# Altium PCB SensorCentral.PcbDoc (part 1 of 3)
Units mm, origin at the board's own origin, x right, y up, seen from the top; angles counter-clockwise.
Board outline 99.21 x 99.07 mm, 6 copper layers (Top Layer 1, GND1, Signal, GND2, GND3, Bottom Layer 1), stack 1.538 mm thick; 91 components, 67 nets, 452 pads, 462 vias.
Unrouted connection lines stored in the file: 278.
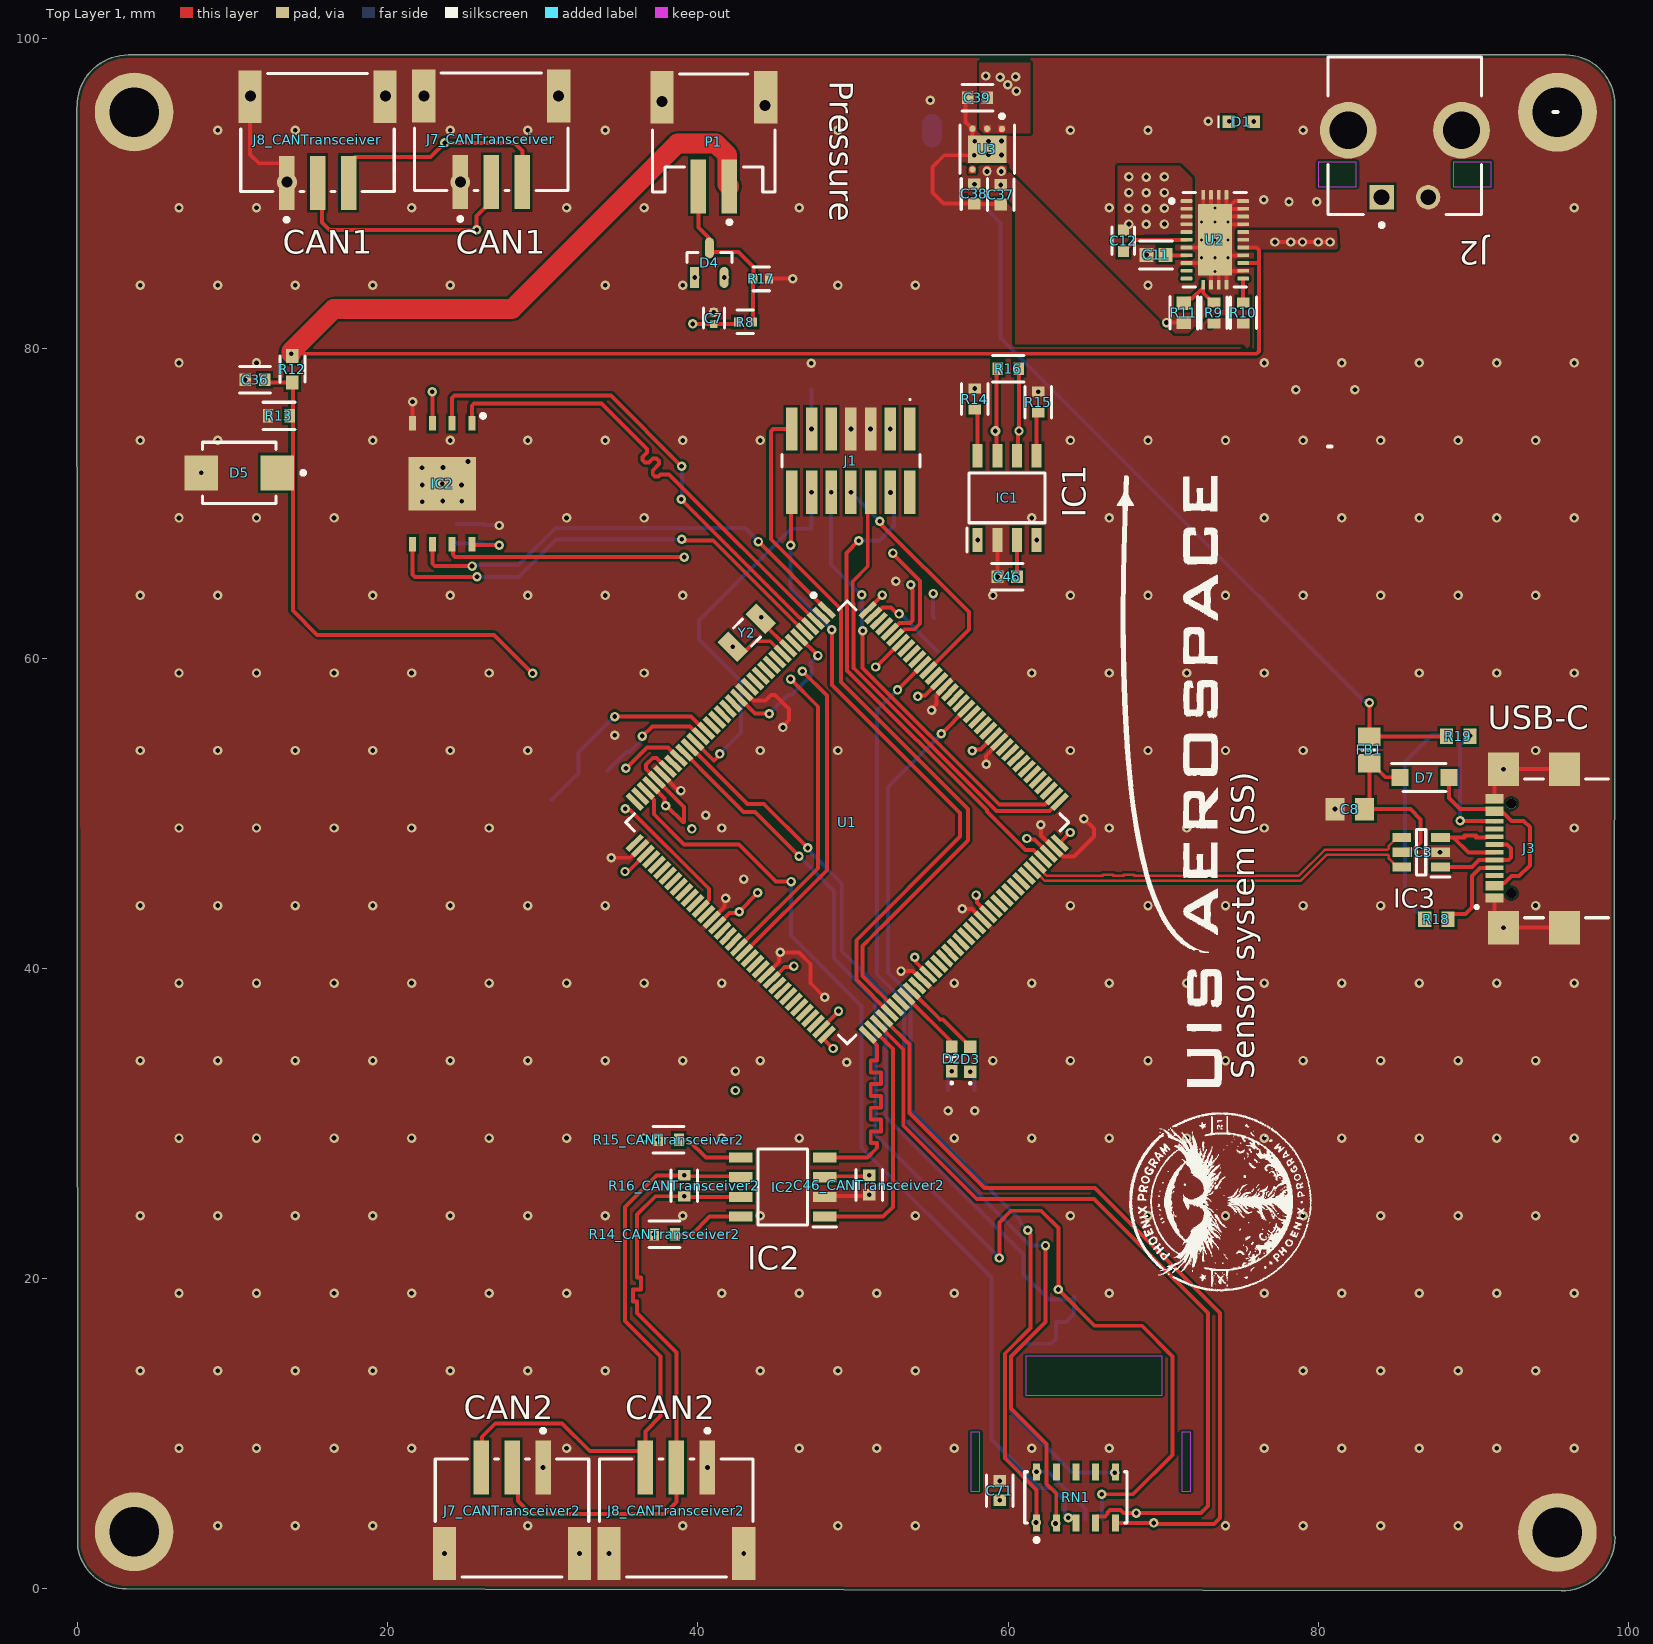
[diagram p0: Top Layer 1 view]
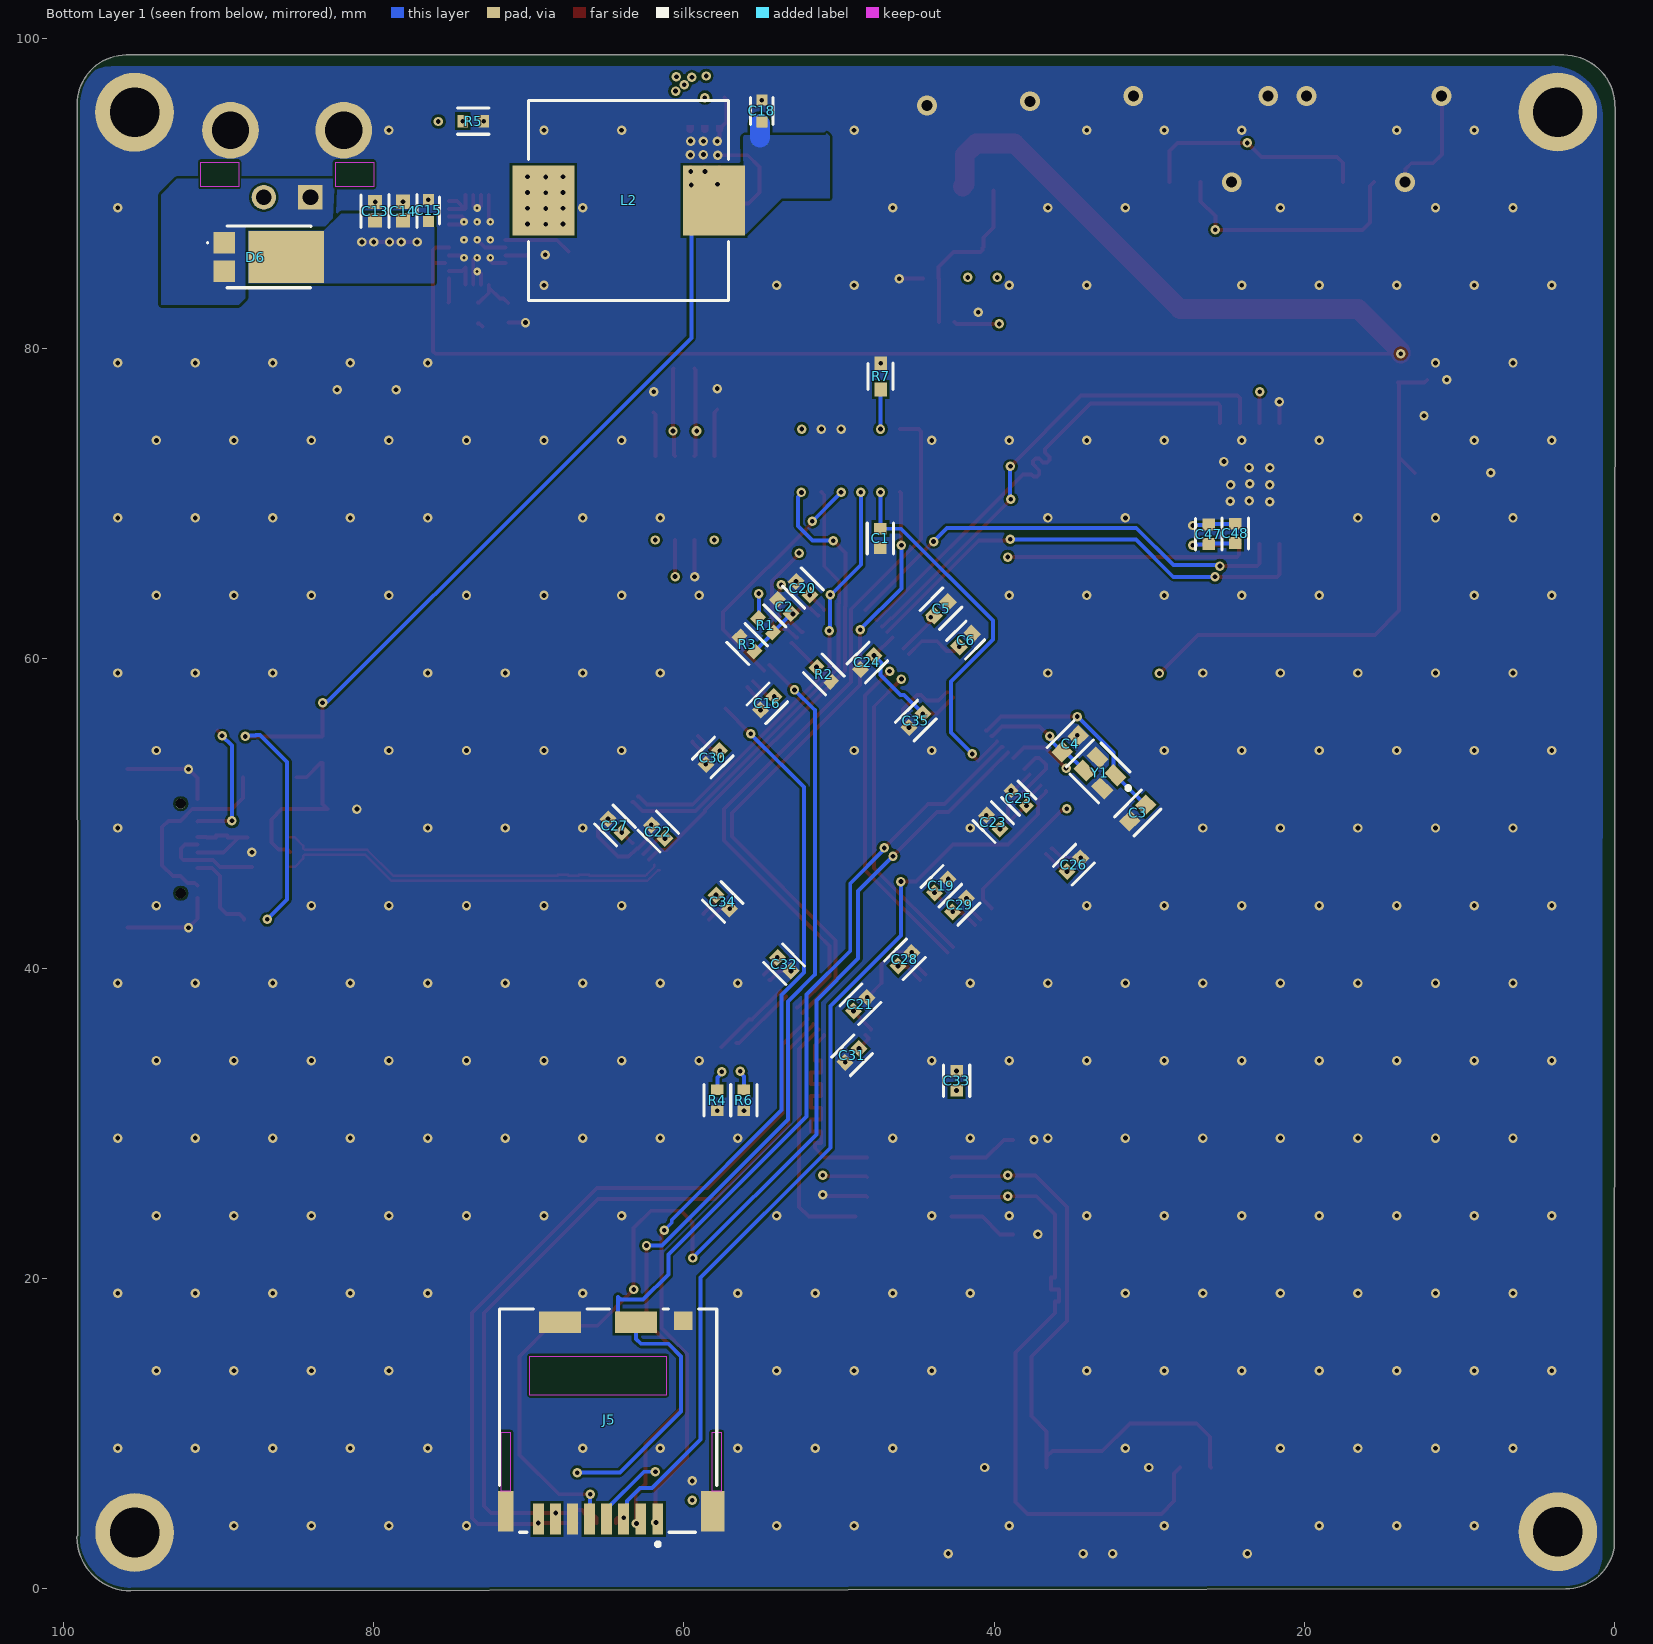
[diagram p1: Bottom Layer 1 view, seen from below]
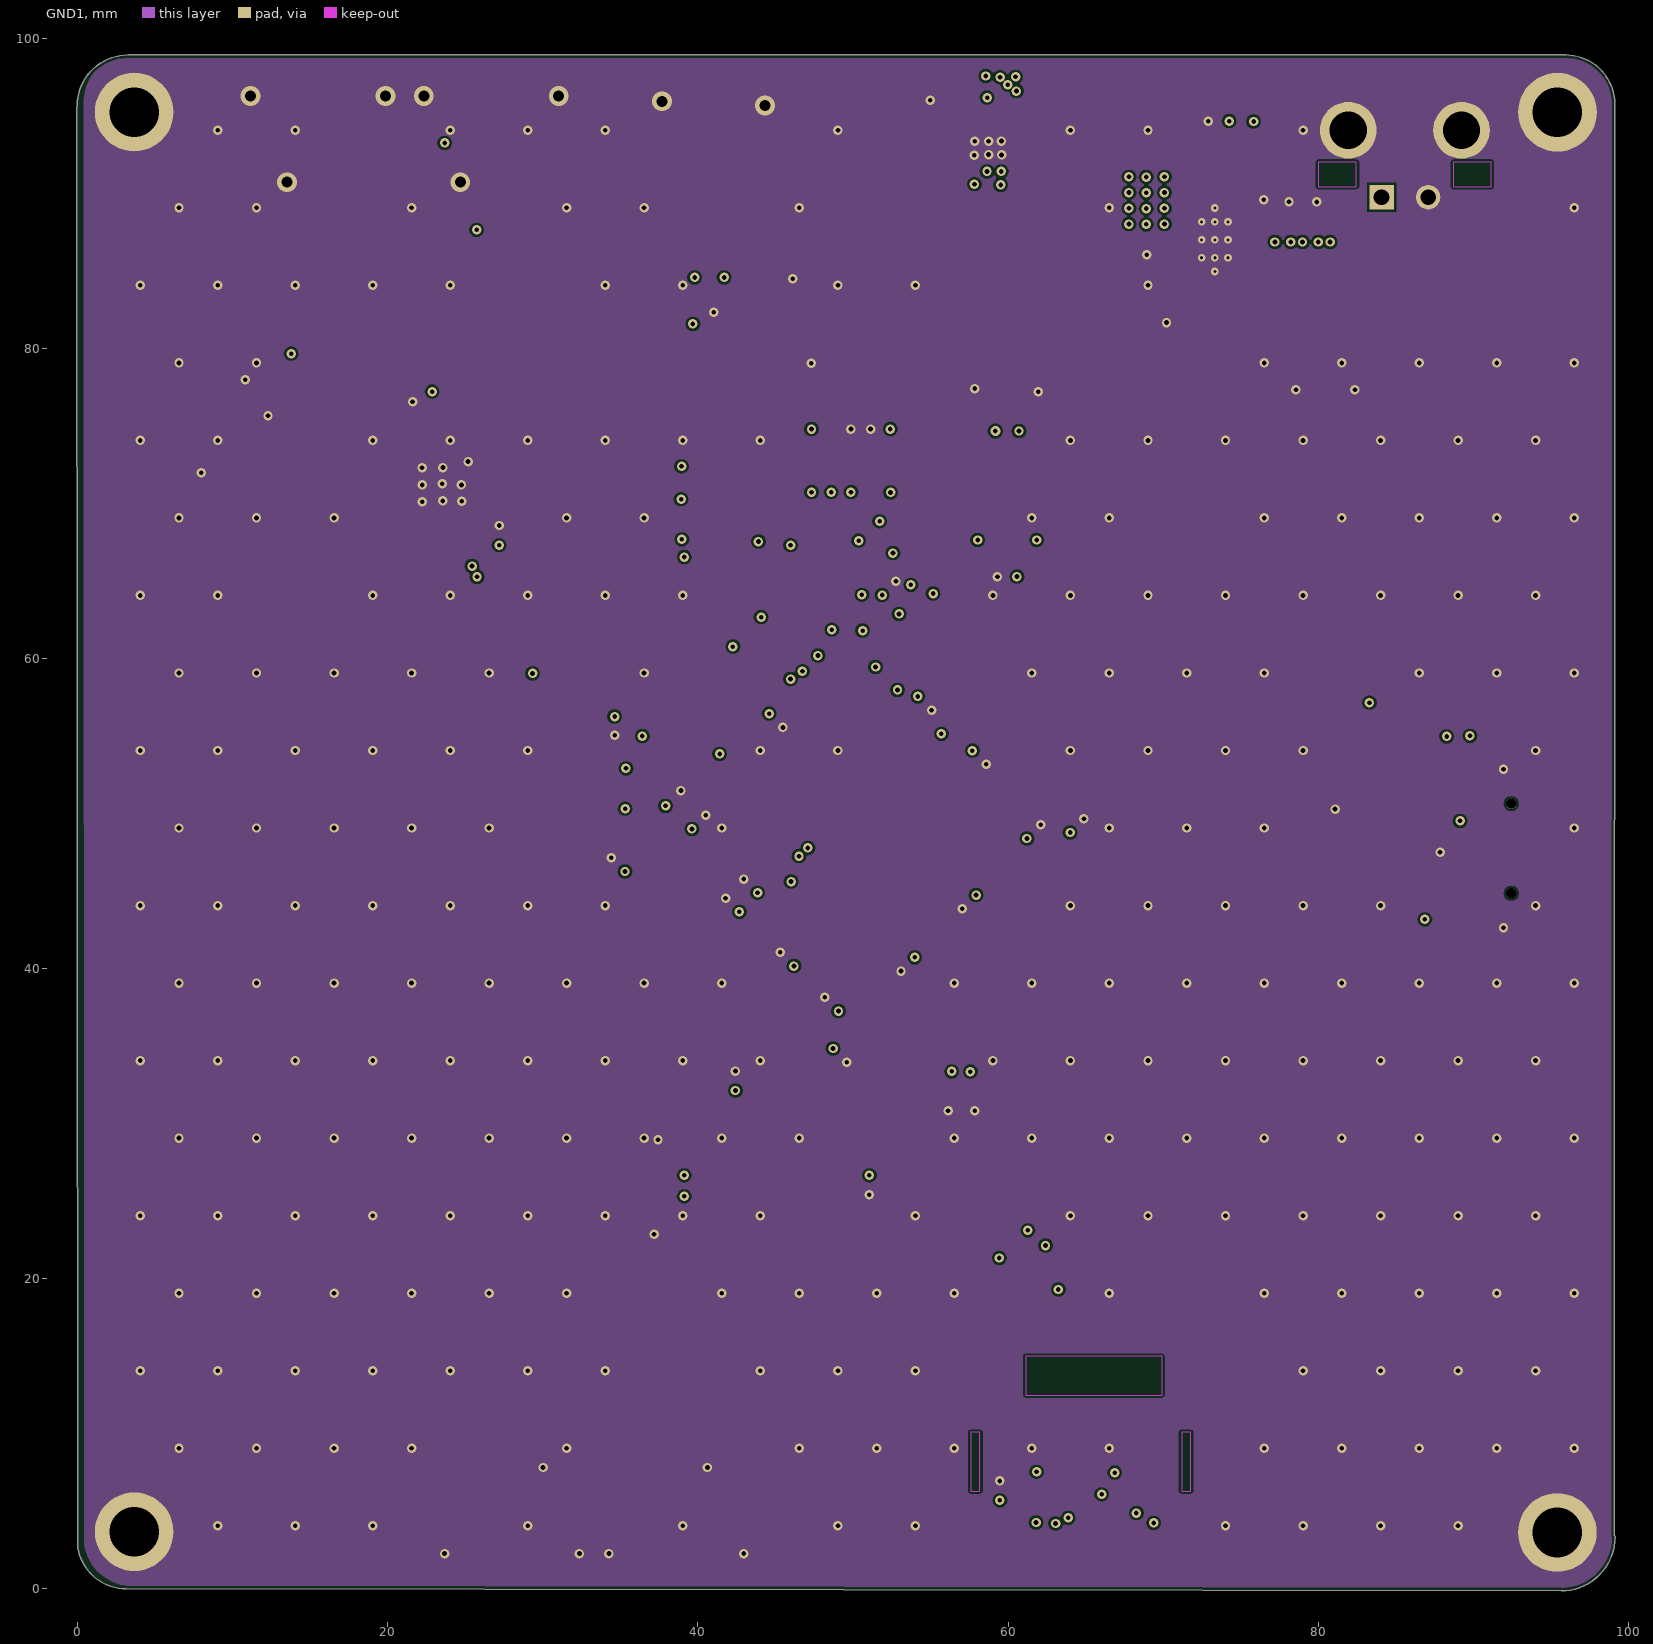
[diagram p2: GND1]
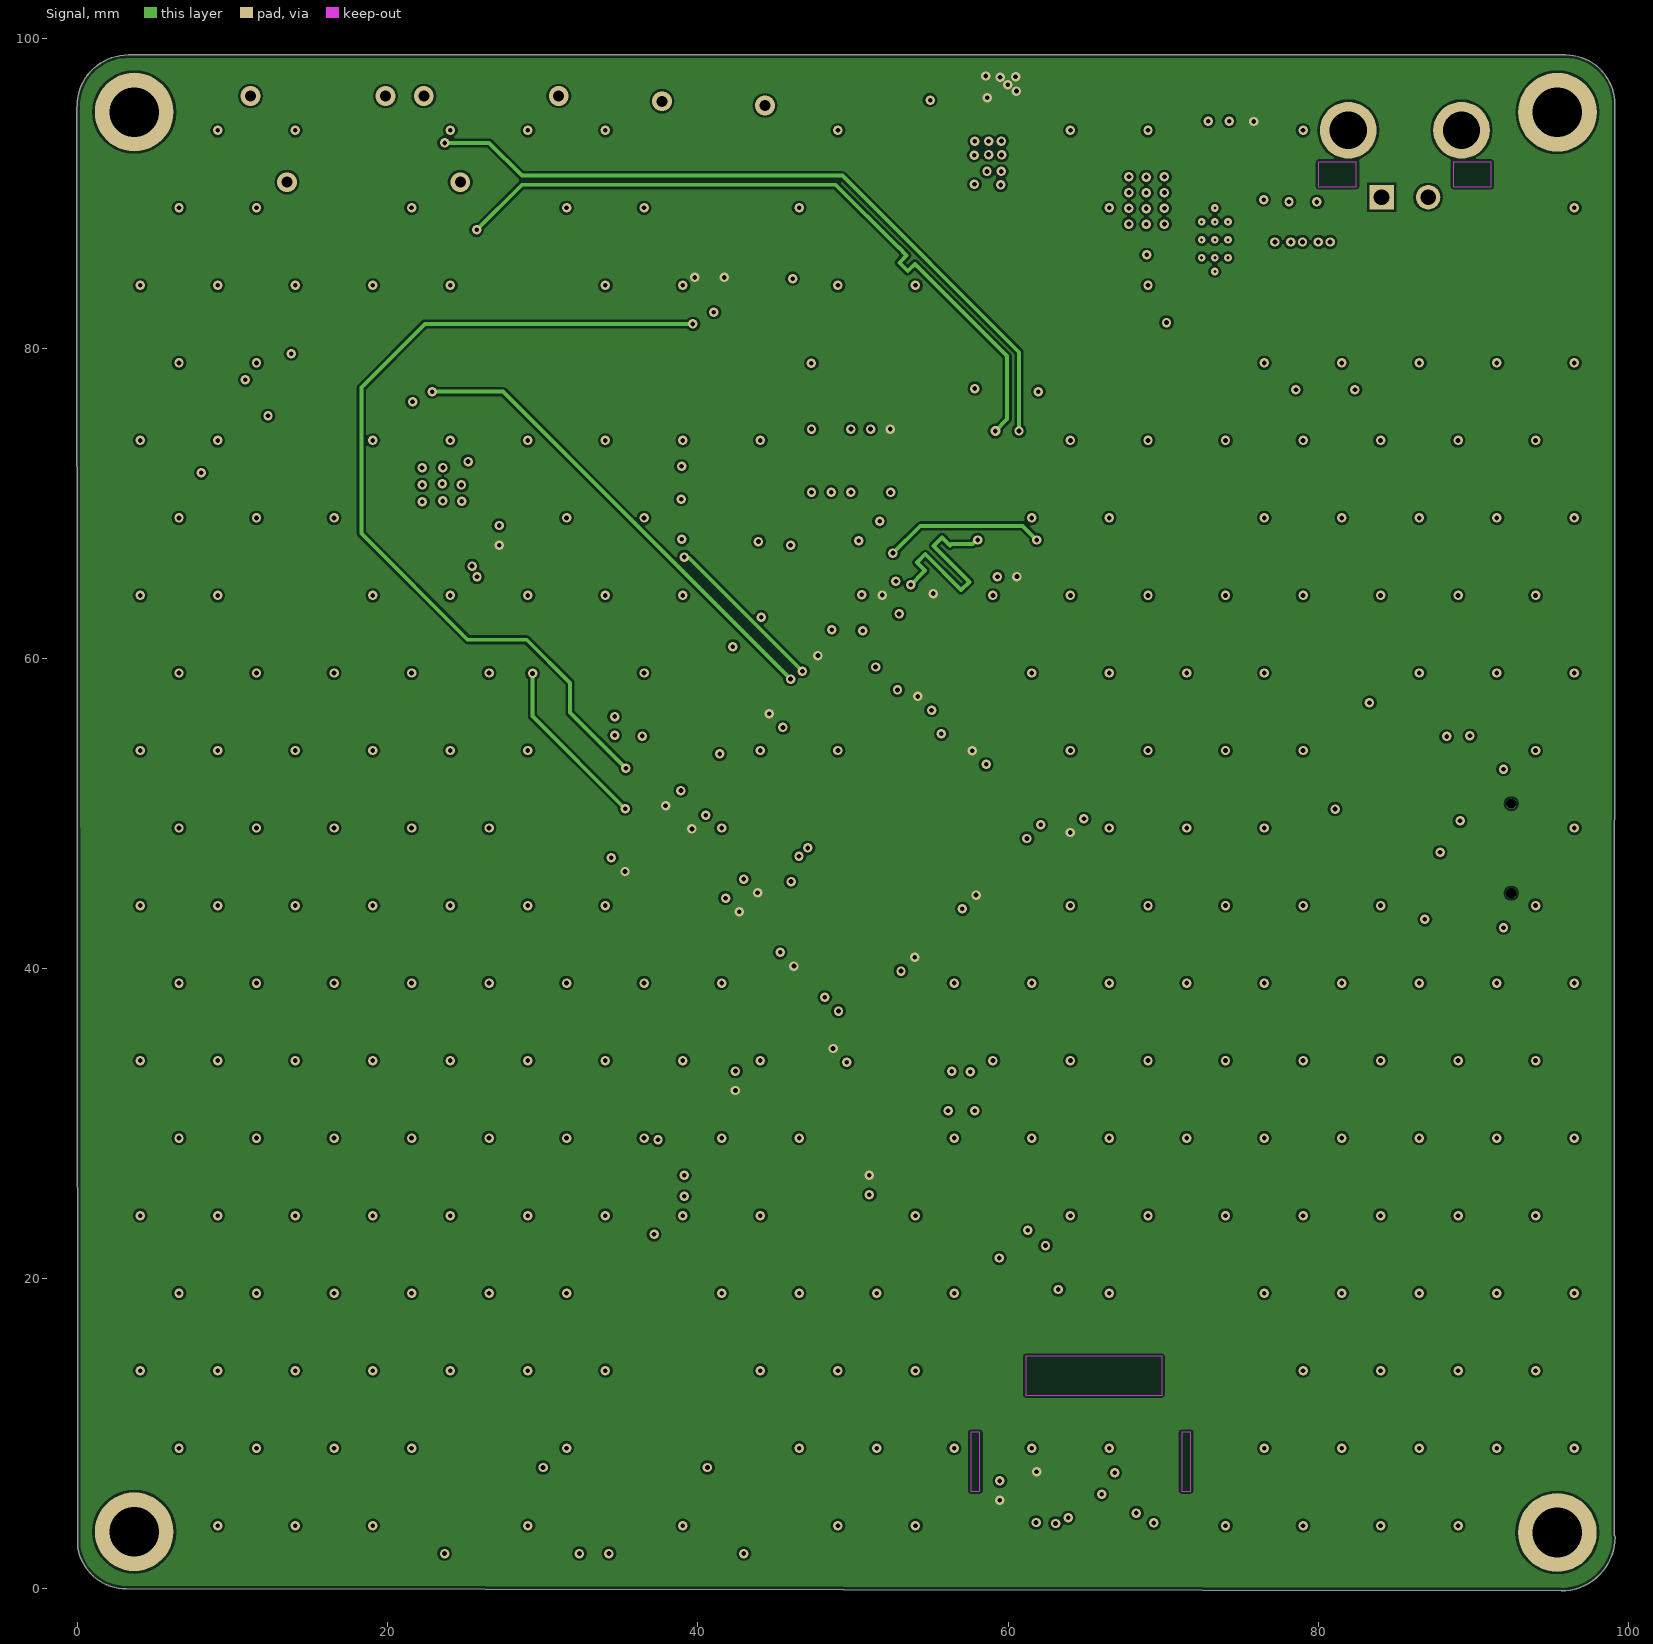
[diagram p3: Signal]
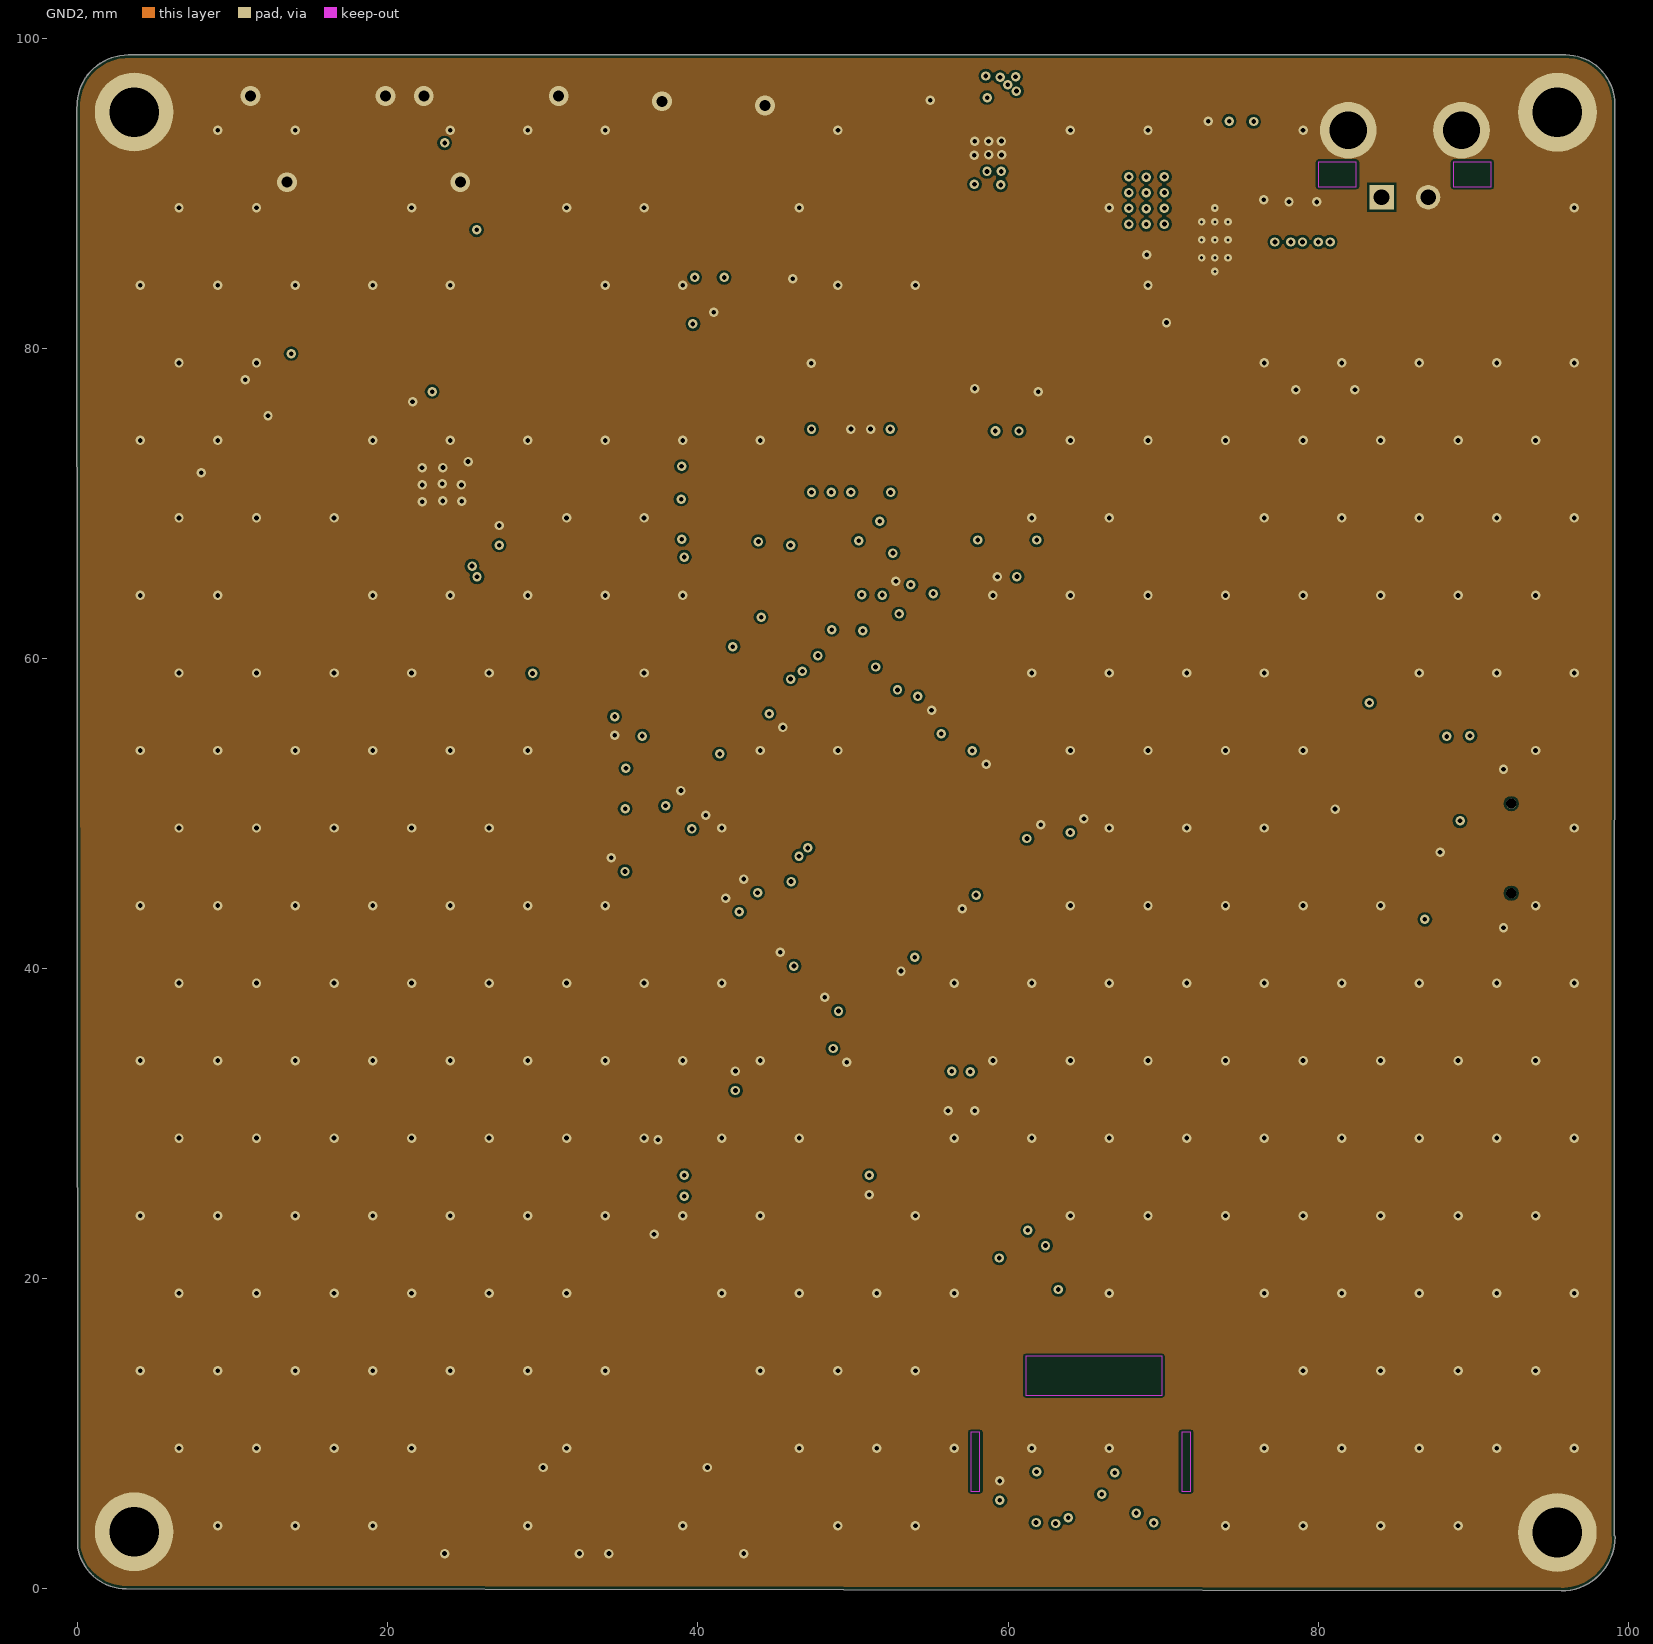
[diagram p4: GND2]
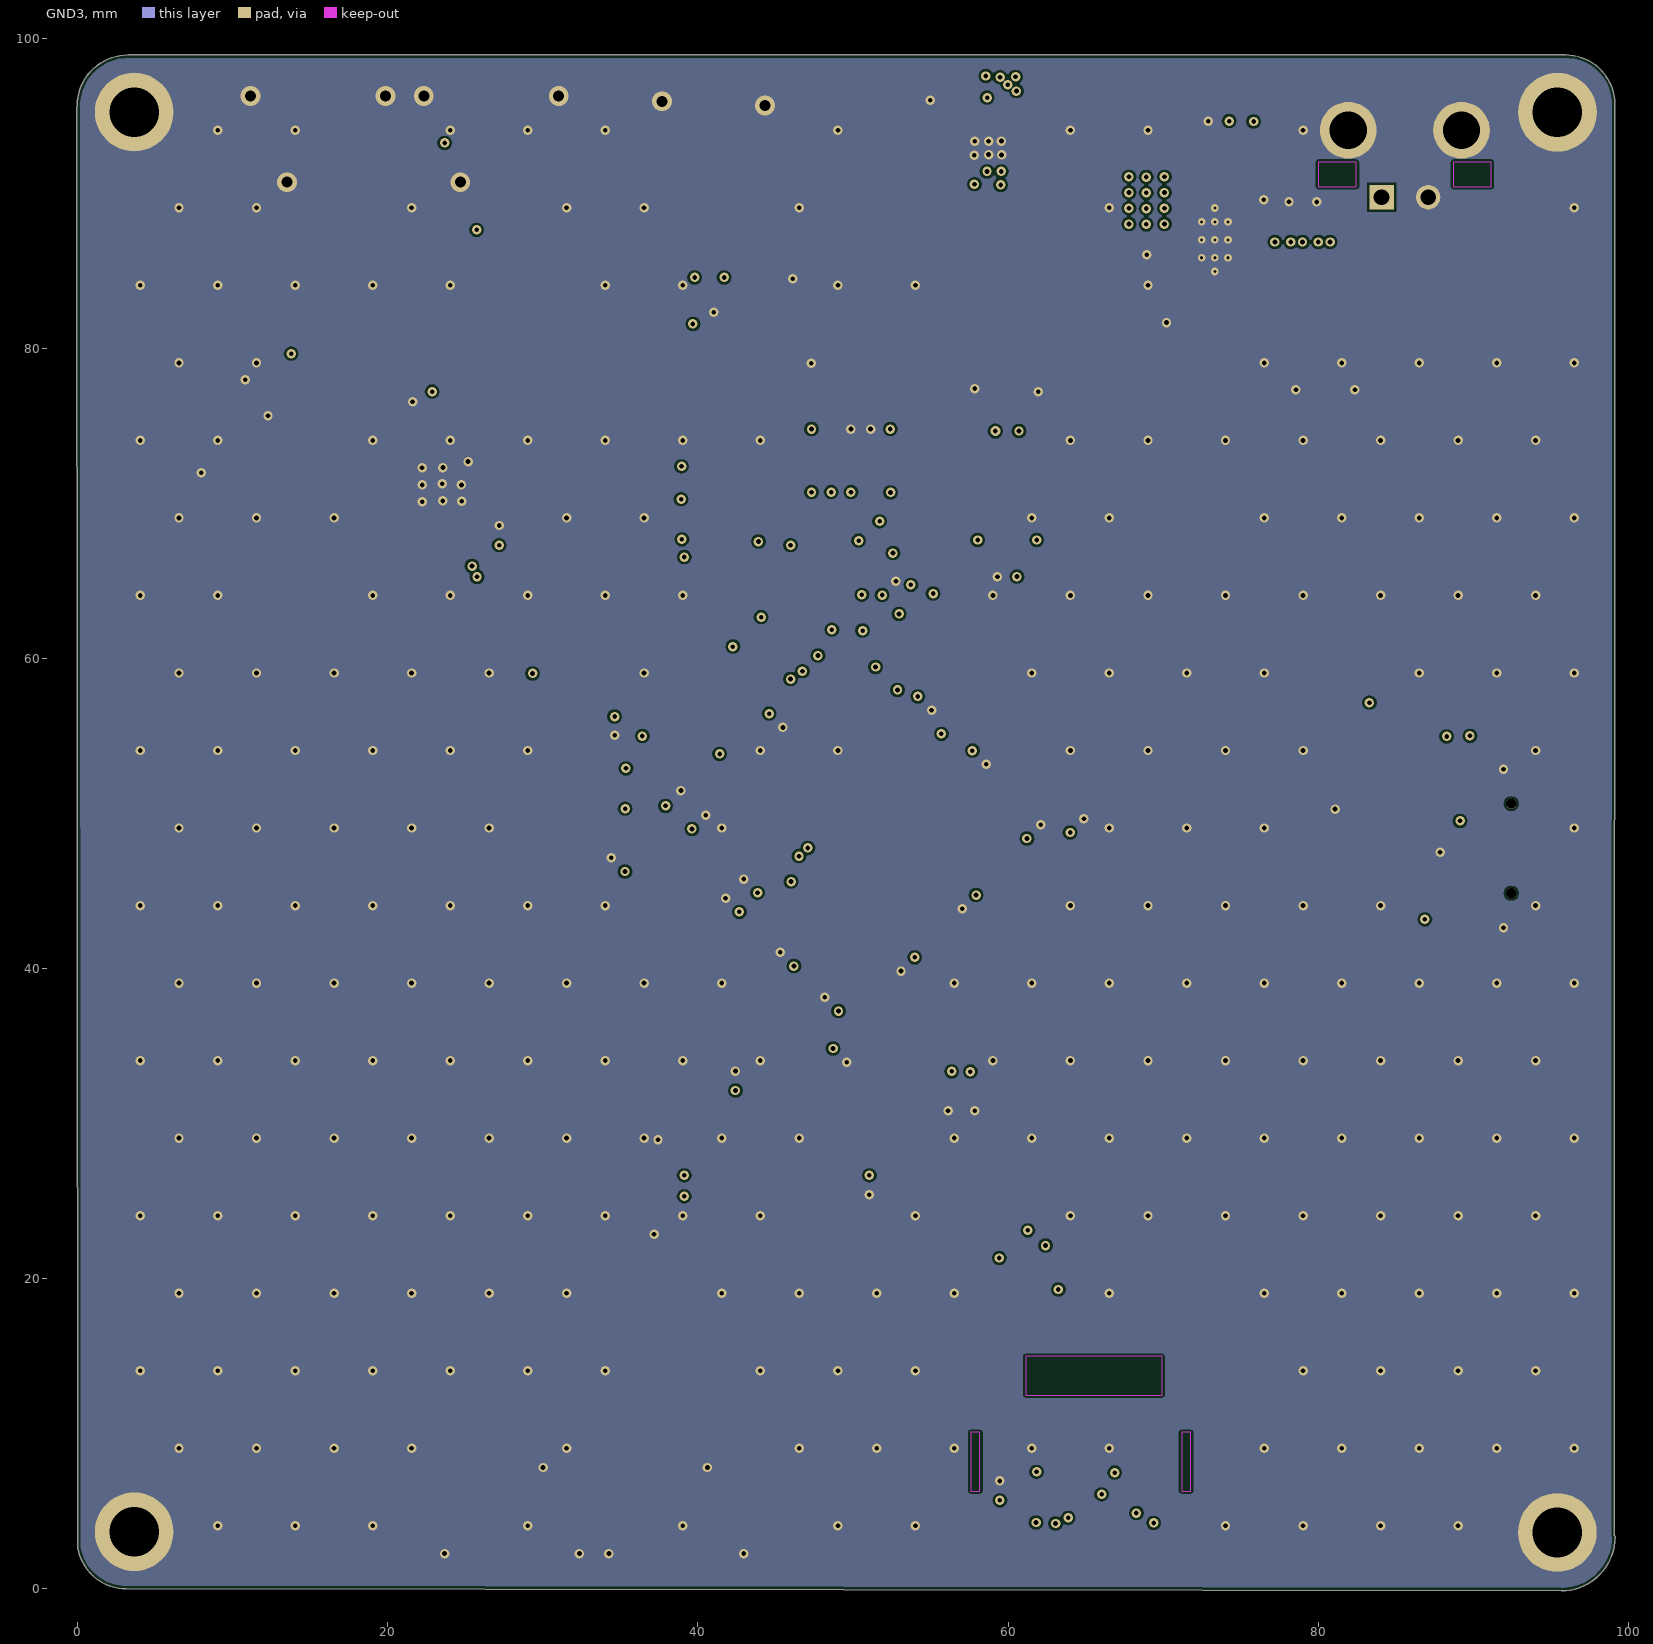
[diagram p5: GND3]
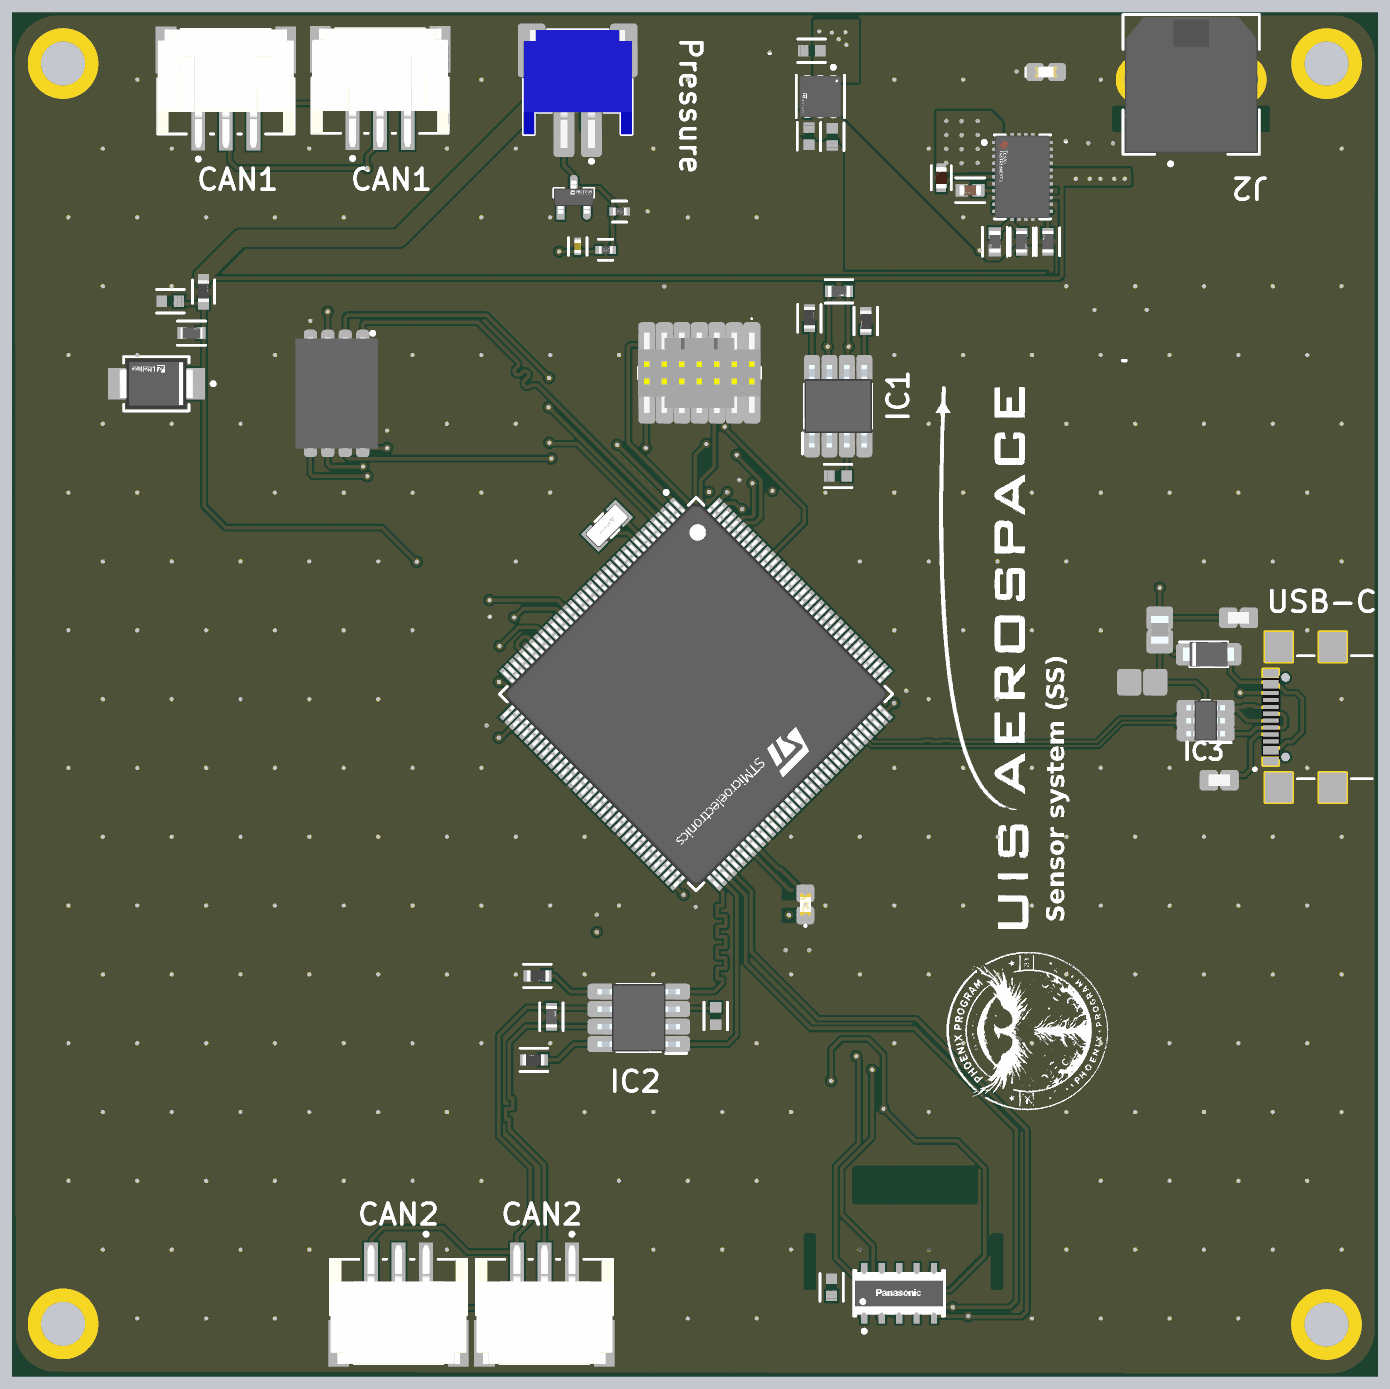
[diagram p7: 3D render of the assembled board from above, using the file's embedded part models]
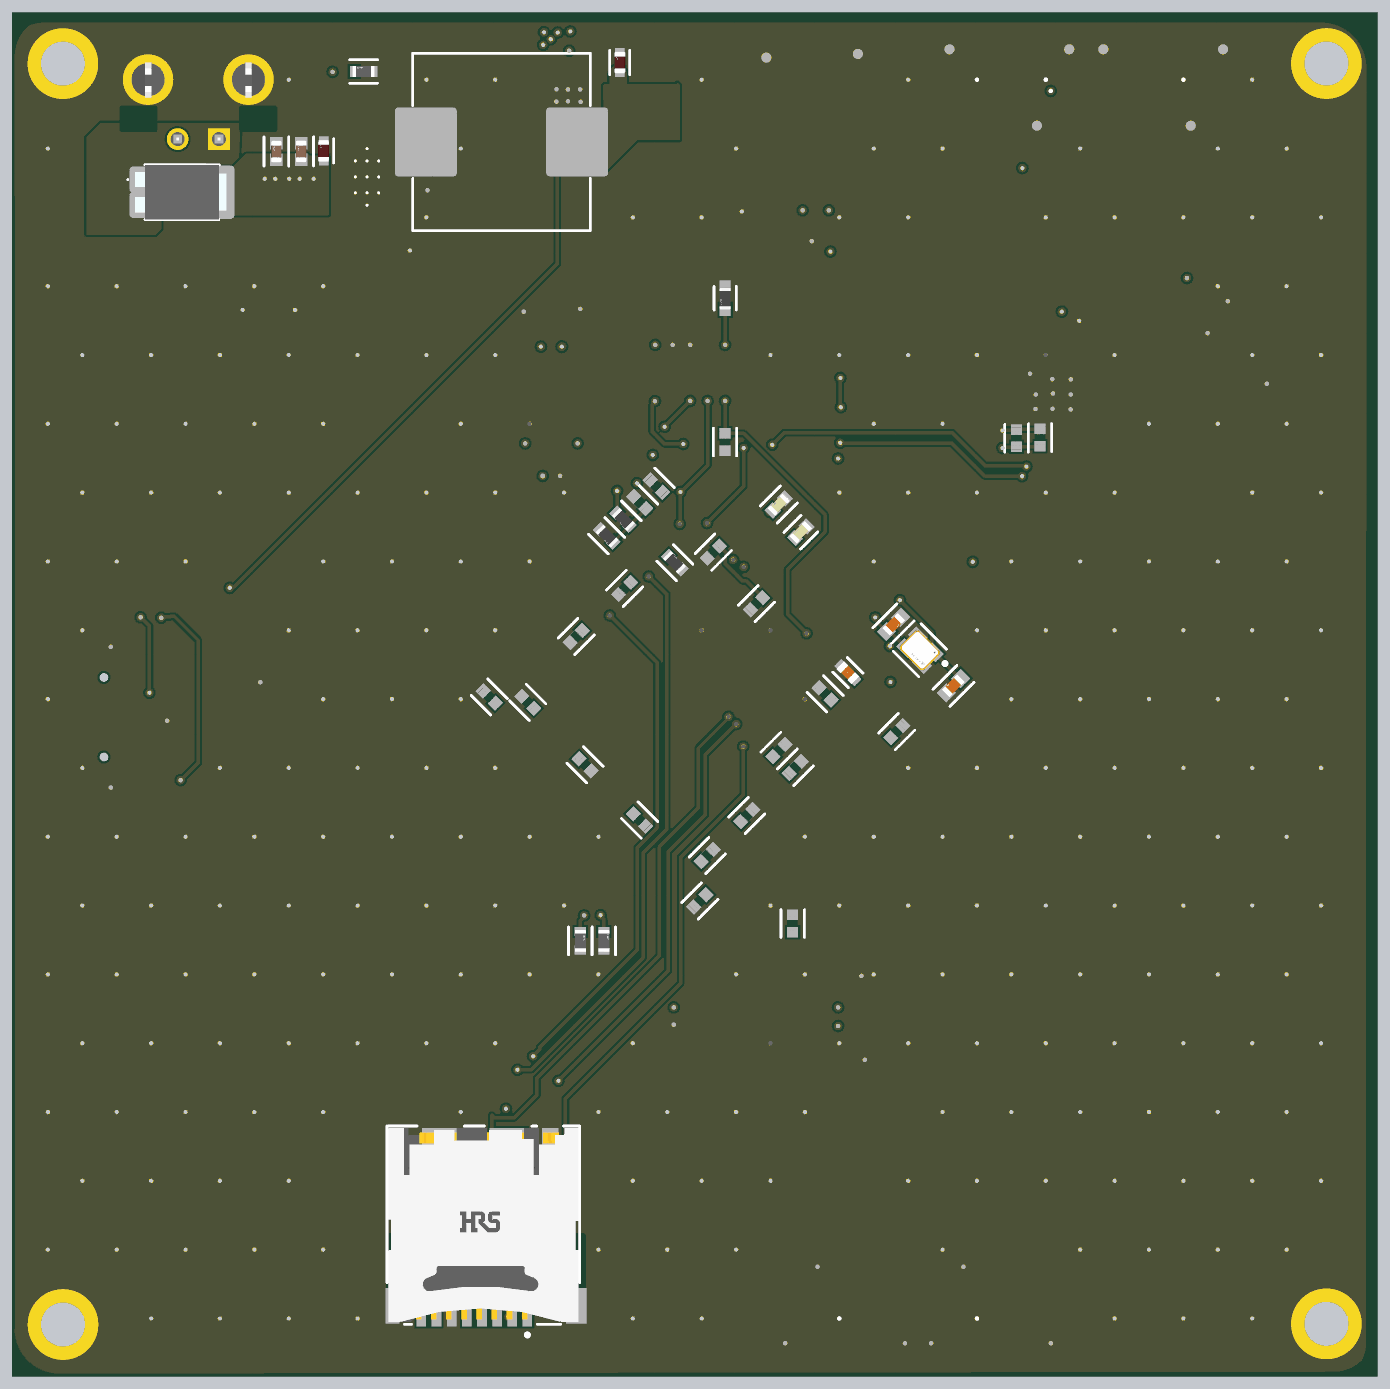
[diagram p8: 3D render of the assembled board from below, using the file's embedded part models]

## Layer stack, top to bottom
Top Solder: solder mask 0.0102, Solder Resist, Dk 3.5
Top Layer 1: signal copper 0.035
Dielectric 2: prepreg 0.0994, PP-006, Dk 4.1
GND1: signal copper 0.0152
Dielectric 4: core 0.55, PP-006, Dk 4.1
Signal: signal copper 0.0152
Dielectric 1: prepreg 0.1088, FR-4, Dk 4.8
GND2: signal copper 0.0152
Dielectric 5: core 0.55, PP-006, Dk 4.1
GND3: signal copper 0.0152
Dielectric 3: prepreg 0.0994, PP-006, Dk 4.1
Bottom Layer 1: signal copper 0.035
Bottom Solder: solder mask 0.0102, Solder Resist, Dk 3.5

## Board outline
-0.002,2.635 ccw(c3.128,3.171) 3.128,-0.004 95.673,-0.135 ccw(c95.673,3.344) 99.152,3.344 99.115,3.433 99.141,95.754 ccw(c95.965,95.754) 95.965,98.929 3.283,98.929 3.258,98.932 ccw(c3.258,95.627) -0.047,95.627 -0.055,95.576

## Design rules (kind name [scope] priority, off if disabled: settings)
BoardOutlineClearance [All] p1: gap=0.2 ignorepadtopadclearanceinfootprint=FALSE
Clearance "Stitching GND" [IsStitchingVia and InNet('GND') vs (IsVia and (Not IsStitchingVia)) Or IsPad] p1: gap=0.2 ignorepadtopadclearanceinfootprint=FALSE
Clearance [All] p2: gap=0.154 ignorepadtopadclearanceinfootprint=TRUE
ComponentClearance [All] p1: gap=0 collisioncheckmode=3 verticalgap=0 showdistances=FALSE
DiffPairsRouting [InDifferentialPair('OTG_FS')] p1: maxlimit=0.254 minlimit=0.127 mostfreqgap=0.254 toplayer_maxgap=0.127 toplayer_prefgap=0.127 toplayer_minwidth=0.165 toplayer_maxwidth=0.165 toplayer_prefwidth=0.165 bottomlayer_maxgap=0.127 bottomlayer_prefgap=0.127 bottomlayer_minwidth=0.165 bottomlayer_maxwidth=0.165 bottomlayer_prefwidth=0.165 impedanceprofiledriven=TRUE impedanceprofileid={DFCE3B1C-77C7-4DEB-9FE5-93ABBD900506} impedanceprofilevalue=90.000000 maxuncoupledlength=12.7
HoleSize [All] p1: absolutevalues=TRUE maxlimit=7.62 minlimit=0.2 maxpercent=80.000 minpercent=20.000
MatchedLengths DiffPair_MatchedLengths [InDifferentialPair ('RX')] p1: tolerance=25.4 checknetsindiffpair=FALSE checkdiffpairvsdiffpair=TRUE checkxsignals=TRUE checkothers=TRUE
MinimumAnnularRing [All] p1: minimumring=0.1
MinimumSolderMaskSliver [All] p1: minsoldermaskwidth=0.1
PasteMaskExpansion PasteMaskExpansion_1 [InPadClass('All Pads')] p1: expansion=0
PasteMaskExpansion [All] p2: expansion=0.254
PlaneClearance [All] p1: clearance=0.381
PlaneConnect [All] p1: pad.planeconnectstyle=Relief pad.reliefexpansion=0.508 pad.reliefentries=4 pad.reliefconductorwidth=0.254 pad.reliefairgap=0.254 via.planeconnectstyle=Direct via.reliefexpansion=0.508 via.reliefentries=4 via.reliefconductorwidth=0.254 via.reliefairgap=0.254
PolygonConnect [All] p1: connectstyle=Direct reliefconductorwidth=0.254 reliefentries=4 polygonreliefangle="90 Angle" airgapwidth=0.254
RoutingLayers [All] p1: top layer_v5=TRUE mid layer 1_v5=TRUE mid layer 2_v5=TRUE mid layer 3_v5=FALSE mid layer 4_v5=FALSE bottom layer_v5=TRUE
RoutingVias [All] p1: holewidth=0.305 width=0.61 viastyle="Through Hole" minholewidth=0.15 minwidth=0.25 maxholewidth=25.4 maxwidth=25.4
SMDNeckDown [All] p1 off: percent=100.000
SilkToSilkClearance [All] p1 off: silktosilkclearance=0.254
SilkToSolderMaskClearance SilkscreenOverComponentPads [IsPad] p1: minsilkscreentomaskgap=0.15 clearancetoexposedcopper=TRUE
SolderMaskExpansion [InPadClass('All Pads')] p1: expansion=0 istentingtop=FALSE useseparateexpansions=TRUE expansionbottom=0 istentingbottom=FALSE
SolderMaskExpansion SolderMaskExpansion_1 [All] p2: expansion=0.025 istentingtop=TRUE useseparateexpansions=TRUE expansionbottom=0.025 istentingbottom=TRUE
SupplyNets "Schematic Supply Nets_3" [InNet('VDD')] p1: voltage=0.000
SupplyNets "Schematic Supply Nets_4" [InNet('VBAT_IN')] p2: voltage=0.000
SupplyNets "Schematic Supply Nets_2" [InNet('VBAT')] p3: voltage=0.000
SupplyNets "Schematic Supply Nets_1" [InNet('GND')] p4: voltage=0.000
SupplyNets "Schematic Supply Nets" [InNet('DCREG5V0')] p5: voltage=0.000
Width [All] p1: maxlimit=12.7 minlimit=0.127 preferedwidth=0.254 midlayer1_maxwidth=1.27 midlayer2_maxwidth=1.27 midlayer3_maxwidth=1.27 midlayer4_maxwidth=1.27 minimp=50.000000 maximp=50.000000 favimp=50.000000
20 further rules are at their usual default settings.

## Classes and differential pairs
component class "USB C": C8 D7 FB1 IC3 J3 R18 R19
component class Pressure: C7 D4 R8 R17
channel class CANTransceiver: CANTransceiver CANTransceiver2
component class CANTransceiver2: C46_CANTransceiver2 IC2 J7_CANTransceiver2 J8_CANTransceiver2 R14_CANTransceiver2 R15_CANTransceiver2 R16_CANTransceiver2
component class TopLevel: J1 P1 R7
component class SD_CARD: C71 J5 RN1
component class Power: C11 C12 C13 C14 C15 C16 C18 C19 C20 C21 C22 C23 C24 C25 C26 C27 C28 C29 C30 C31 C32 C33 C34 C35 C36 C37 C38 C39 D5 D6 J2 L2 R9 R10 R11 R12 R13 U2 U3
component class MCU: C1 C2 C3 C4 C5 C6 D1 D2 D3 R1 R2 R3 R4 R5 R6 U1 Y1 Y2
component class CANTransceiver: C46 IC1 J7_CANTransceiver J8_CANTransceiver R14 R15 R16
component class 1GBIT_FLASH: C47 C48 IC2
differential pair OTG_FS: +OTG_FS_P -OTG_FS_N

## Components (designator, comment, footprint, x,y, rotation, side; value= is the part's Value field where it differs from the comment)
C1 "0.1uF" FP-CL10-IPC_C 47.33,67.747 r270 bottom
C2 "0.1uF" FP-CL10-IPC_C 53.526,63.354 r45 bottom
C3 "4pF" FP-GQM187-0_15-IPC_B 30.734,50.038 r315 bottom
C4 "4pF" FP-GQM187-0_15-IPC_B 35.088,54.499 r135 bottom
C5 "1.5pF" FP-C0603C-CF-IPC_C 43.419,63.209 r135 bottom value="1.5 pF"
C6 "1.5pF" FP-C0603C-CF-MFG 41.828,61.194 r135 bottom value="1.5 pF"
C7 "10 nF 402" FP-GJM155-0_05-IPC_C 41.027,81.96 r90 top
C8 "08053C104JAZ2A" CAPC2012X09N 82.042,50.292 r180 top value=100nF
C11 "2.2uF 50v" FP-GRM188-0_2-IPC_C 69.544,86.038 r180 top
C12 "0.47uF 50v" FP-0603-L_1_6_0_15-W_0_8-MFG 67.442,86.946 r90 top
C13 "2.2uF 50v" FP-GRM188-0_2-IPC_C 79.92,88.853 r90 bottom
C14 "2.2uF 50v" FP-GRM188-0_2-IPC_C 78.122,88.862 r90 bottom
C15 "0.47uF 50v" FP-0603-L_1_6_0_15-W_0_8-MFG 76.488,88.899 r90 bottom
C16 "0.1uF" FP-CL10-IPC_C 54.622,57.111 r315 bottom
C18 "0.47uF 50v" FP-0603-L_1_6_0_15-W_0_8-MFG 54.974,95.318 r90 bottom
C19 "10uF" FP-CL10-IPC_C 43.404,45.336 r135 bottom
C20 "0.1uF" FP-CL10-IPC_C 52.323,64.541 r45 bottom
C21 "2.2uF" FP-CL10-IPC_C 48.622,37.705 r135 bottom
C22 "2.2uF" FP-CL10-IPC_C 61.659,48.835 r45 bottom
C23 "1uF" FP-CL10-IPC_C 40.053,49.451 r45 bottom
C24 "0.1uF" FP-CL10-IPC_C 48.179,59.747 r315 bottom
C25 "4.7uF" FP-C1608-080-0_1-MFG 38.405,50.992 r225 bottom
C26 "0.1uF" FP-CL10-IPC_C 34.851,46.707 r135 bottom
C27 "0.1uF" FP-CL10-IPC_C 64.452,49.222 r45 bottom
C28 "0.1uF" FP-CL10-IPC_C 45.748,40.607 r135 bottom
C29 "0.1uF" FP-CL10-IPC_C 42.224,44.105 r135 bottom
C30 "0.1uF" FP-CL10-IPC_C 58.143,53.617 r315 bottom
C31 "0.1uF" FP-CL10-IPC_C 49.157,34.404 r315 bottom
C32 "0.1uF" FP-CL10-IPC_C 53.539,40.285 r225 bottom
C33 "0.1uF" FP-CL10-IPC_C 42.418,32.766 r90 bottom
C34 "0.1uF" FP-CL10-IPC_C 57.495,44.301 r225 bottom
C35 "0.1uF" FP-CL10-IPC_C 45.038,56.003 r315 bottom
C36 "0.1uF" FP-CL10-IPC_C 11.43,77.978 r180 top
C37 "10uF" FP-CL10-IPC_C 59.522,89.919 r270 top
C38 "0.1uF" FP-CL10-IPC_C 57.833,89.966 r270 top
C39 "10uF" FP-CL10-IPC_C 58.024,96.176 r180 top
C46 "1uF" FP-CL10-IPC_C 59.944,65.278 r180 top
C46_CANTransceiver2 "1uF" FP-CL10-IPC_C 51.054,26.043 r270 top (schematic designator C46)
C47 "0.1uF" FP-CL10-IPC_C 26.151,68.022 r90 bottom
C48 "1uF" FP-CL10-IPC_C 24.444,68.072 r90 bottom
C71 "0.1uF" FP-CL10-IPC_C 59.473,6.331 r90 top
D1 "150060RS75000" WL-SMCW_0603_150060xx75000 75.045,94.628 r0 top
D2 "150060GS55040" WL-SMCD_0603 -1213.633,1304.173 r90 top
D3 "150060YS75020" WL-SMCW_0603_150060xx75020 57.566,34.153 r90 top
D4 "BAT54A" FP-BAT54A-IPC_B 40.738,85.533 r90 top
D5 "SMBJ33A" FP-SMBJ-MFG 10.414,71.98 r180 top
D6 "SBRT10U50SP5-13" SBRT10U50SP513 86.873,85.897 r270 bottom
D7 "SS34LWHRVG" SODFL3718X102N 86.868,52.324 r0 top
FB1 "MPZ2012S101AT000" BEADC2012X105N 83.312,54.102 r270 top
IC1 "TCAN3414DR" SOIC127P600X175-8N 59.944,70.358 r90 top
IC2 "TCAN3414DR" SOIC127P600X175-8N 45.466,25.908 r180 top (schematic designator IC1)
IC2 "W25Q01JVZEIM_TU" SON127P800X600X80-9N-D 23.507,71.276 r270 top locked
IC3 "USBLC6-2SC6" SOT95P280X145-6N 86.645,47.508 r180 top
J1 "FTSH-107-01-L-DV-K-TR" FTSH10701LDVKTR 49.864,72.767 r180 top locked
J2 "43650-0205" FP-43650-0205-MFG 85.598,93.726 r180 top
J3 "USB4940-00-A_REVA" GCT_USB4940-00-A_REVA 92.456,47.752 r90 top
J5 "DM3CS-SF" FP-DM3CS-SF-MFG 64.888,10.849 r180 bottom
J7_CANTransceiver "S3B-PH-SM4-TB(LF)(SN)" FP-S3B-PH-SM4-TB_LF_SN-MFG 26.67,93.98 r0 top (schematic designator J7)
J7_CANTransceiver2 "S3B-PH-SM4-TB(LF)(SN)" FP-S3B-PH-SM4-TB_LF_SN-MFG 28.008,4.572 r180 top (schematic designator J7)
J8_CANTransceiver "S3B-PH-SM4-TB(LF)(SN)" FP-S3B-PH-SM4-TB_LF_SN-MFG 15.462,93.928 r0 top (schematic designator J8)
J8_CANTransceiver2 "S3B-PH-SM4-TB(LF)(SN)" FP-S3B-PH-SM4-TB_LF_SN-MFG 38.608,4.572 r180 top (schematic designator J8)
L2 "SRP1270-100M" BOUR-SRP1270-100M-2_V 63.569,89.549 r180 bottom
P1 "S2B-PH-SM4-TB(LF)(SN)" "JST- S2B-PH-SM4-TB(LF)(SN)-2_V" 41.027,93.898 r180 top
R1 "10k" FP-RT0603-IPC_C 54.742,62.146 r225 bottom value=10KΩ
R2 "10k" FP-RT0603-IPC_C 50.977,58.978 r45 bottom value=10KΩ
R3 "10k" FP-RT0603-IPC_C 55.928,60.934 r225 bottom value=10KΩ
R4 "220 0603" FP-AF0603-IPC_C 57.847,31.507 r90 bottom
R5 "220 0603" FP-AF0603-IPC_C 73.588,94.664 r0 bottom
R6 "220 0603" FP-AF0603-IPC_C 56.134,31.507 r90 bottom
R7 "100" FP-RT0603-MFG 47.315,78.197 r270 bottom value=100Ω
R8 "10 K" FP-RP73P-1E-MFG 43.059,81.706 r180 top value=165Ω
R9 "100k" FP-RC0603-0_55-IPC_C 73.284,82.296 r270 top
R10 "100k" FP-RC0603-0_55-IPC_C 75.184,82.296 r90 top
R11 "24.9k" FP-RG1608-IPC_C 71.334,82.296 r270 top
R12 "147K" FP-RT0603-MFG 13.837,78.669 r90 top value=147KΩ
R13 "10K" FP-ERJPB3-IPC_C 12.969,75.659 r0 top
R14 "10k" FP-RT0603-IPC_C 57.855,76.737 r90 top value=10KΩ
R14_CANTransceiver2 "10k" FP-RT0603-IPC_C 37.846,22.86 r180 top value=10KΩ (schematic designator R14)
R15 "10k" FP-RT0603-IPC_C 61.954,76.539 r270 top value=10KΩ
R15_CANTransceiver2 "10k" FP-RT0603-IPC_C 38.1,28.956 r0 top value=10KΩ (schematic designator R15)
R16 "120" FP-AF0603-IPC_C 60.011,78.695 r0 top
R16_CANTransceiver2 "120" FP-AF0603-IPC_C 39.116,25.993 r90 top (schematic designator R16)
R17 "165" FP-RP73P-1E-MFG 44.075,84.5 r0 top value=165Ω
R18 "56k" RESC1608X50N 87.63,43.18 r0 top
R19 "56k" RESC1608X50N 89.039,54.977 r180 top
RN1 "EXB-A10P103J" FP-EXBA-MFG 64.38,5.897 r0 top
U1 "STM32H753ZIT6" FP-LQFP144-1A-MFG 49.628,49.431 r315 top locked
U2 "LM76005RNPR" FP-RNP0030A-MFG 73.34,87.009 r0 top
U3 "LD39200PU33R" FP-DFN6-7946637-MFG 58.655,92.851 r270 top
Y1 "ABM10W-50.0000MHZ-4-B1U-T3" FP-ABM10W-MFG 33.171,52.623 r45 bottom
Y2 "ABS07AIG-32.768KHZ-6-D-T" FP-ABS07AIG-MFG 43.154,61.671 r225 top

## Footprints (in the part's own frame and the unit in brackets; to place one, negate y for a bottom-side part, rotate by r counter-clockwise, add the part's x,y. Pads: shape width x height; smd on the part's side, far side on the other; paste and mask are expansions set on the pad)
BEADC2012X105N [mm]
  rect 1.2x1.45 smd: 1(-0.85,0) 2(0.85,0)
  silkscreen extent 0,-0.53 0,0.53, body extent -1,-0.63 1,0.63, height 1.05
BOUR-SRP1270-100M-2_V [mm] "SMD, 2-Leads, Body 12.9x12.9mm"
  rect 4x4.5 smd: 1(-5.5,0) 2(5.5,0)
  silkscreen extent -6.45,-6.45 6.45,6.45, body extent -6.45,-6.45 6.45,6.45, height 7
CAPC2012X09N [mm] "Chip Capacitor, 2-Leads, Body 2,05x1,25mm, IPC Medium Density"
  rect 1.25x1.45 smd: 1(-0.95,0) 2(0.95,0)
  body extent -1.08,-0.72 1.07,0.72, height 0.94
FP-0603-L_1_6_0_15-W_0_8-MFG [mm]
  rect 0.7x0.7 smd paste+0 mask+0: 1(-0.7,0) 2(0.7,0)
  silkscreen extent -0.87,-0.72 0.87,0.72, body extent -0.8,-0.4 0.8,0.4, height 0.95
FP-43650-0205-MFG [mm]
  rect 1.57x1.57 hole 1.02 paste-2539.97 mask+0: 1(1.5,3.97)
  round 1.57 hole 1.02 paste-2539.97 mask+0: 2(-1.5,3.97)
  round 3.66 hole 2.41 paste-2539.97 mask+0: 3(-3.65,-0.35) 4(3.65,-0.35)
  Keep-Out Layer region: -5.575,1.7 -3.125,1.7 -3.125,3.3 -5.575,3.3
  Keep-Out Layer region: 3.125,1.7 5.575,1.7 5.575,3.3 3.125,3.3
  silkscreen extent -4.95,-5.07 4.95,5.89, body extent -5.58,-5.18 5.58,5.18, height 0.25
FP-ABM10W-MFG [mm]
  rect 1.2x0.85 smd paste+0 mask+0: 1(-0.812,-0.6) 2(0.812,-0.6) 3(0.812,0.6) 4(-0.812,0.6)
  silkscreen extent -2.1,-1.42 1.3,1.43, body extent -1.25,-1 1.25,1, height 0.6
FP-ABS07AIG-MFG [mm]
  rect 1x1.8 smd paste+0 mask+0: 1(-1.275,0) 2(1.275,0)
  silkscreen extent -0.4,-0.82 0.4,0.82, body extent -1.6,-0.75 1.6,0.75, height 0.9
FP-AF0603-IPC_C [mm]
  rect 0.659x0.812 smd paste+0 mask+0: 1(-0.677,0) 2(0.677,0)
  silkscreen extent -1.01,-0.85 1.01,0.85, body extent -0.8,-0.4 0.8,0.4, height 0.55
FP-BAT54A-IPC_B [mm]
  rect 1.357x0.572 smd paste+0 mask+0: 1(-0.951,0.95)
  rrect100% 1.357x0.572 smd paste+0 mask+0: 2(-0.951,-0.95) 3(0.951,0)
  silkscreen extent 0,-1.45 0.65,1.45, body extent -1.88,-1.7 1.88,1.7, height 0.25
FP-C0603C-CF-IPC_C [mm]
  rect 0.807x0.858 smd paste+0 mask+0: 1(-0.626,0) 2(0.626,0)
  silkscreen extent -1.03,-0.88 1.03,0.88, body extent -0.8,-0.4 0.8,0.4, height 0.87
FP-C0603C-CF-MFG [mm]
  rect 0.75x0.9 smd paste+0 mask+0: 1(-0.6,0) 2(0.6,0)
  silkscreen extent -0.87,-0.85 0.88,0.85, body extent -0.8,-0.4 0.8,0.4, height 0.87
FP-C1608-080-0_1-MFG [mm]
  rect 0.7x0.7 smd paste+0 mask+0: 1(-0.7,0) 2(0.7,0)
  silkscreen extent -0.8,-0.75 0.8,0.75, body extent -0.8,-0.4 0.8,0.4, height 0.9
FP-CL10-IPC_C [mm]
  rect 0.758x0.812 smd paste+0 mask+0: 1(-0.627,0) 2(0.627,0)
  silkscreen extent -1.01,-0.85 1.01,0.85, body extent -0.8,-0.4 0.8,0.4, height 0.9
FP-DFN6-7946637-MFG [mm]
  round 0.405 smd paste+0 mask+0: 1(-1.3,0.95) 2(-1.321,0) 3(-1.321,-0.95) 4(1.3,-0.95) 5(1.321,0) 6(1.321,0.95)
  rect 1.75x2.5 smd paste+0 mask+0: 7(0,0)
  Top Layer 1 region: -1.55,1.175 -1.275,1.175 -1.189,1.158 -1.116,1.109 -1.067,1.036 -1.05,0.95 -1.05,0.95 -1.067,0.864 -1.116,0.791 -1.189,0.742 -1.275,0.725 -1.275,0.725 -1.55,0.725
  Top Layer 1 region: -1.55,0.225 -1.275,0.225 -1.189,0.208 -1.116,0.159 -1.067,0.086 -1.05,0 -1.05,0 -1.067,-0.086 -1.116,-0.159 -1.189,-0.208 -1.275,-0.225 -1.275,-0.225 -1.55,-0.225
  Top Layer 1 region: -1.55,-0.725 -1.275,-0.725 -1.189,-0.742 -1.116,-0.791 -1.067,-0.864 -1.05,-0.95 -1.05,-0.95 -1.067,-1.036 -1.116,-1.109 -1.189,-1.158 -1.275,-1.175 -1.275,-1.175 -1.55,-1.175
  Top Layer 1 region: 1.55,0.725 1.275,0.725 1.189,0.742 1.116,0.791 1.067,0.864 1.05,0.95 1.05,0.95 1.067,1.036 1.116,1.109 1.189,1.158 1.275,1.175 1.275,1.175 1.55,1.175
  Top Layer 1 region: 1.55,-0.225 1.275,-0.225 1.189,-0.208 1.116,-0.159 1.067,-0.086 1.05,0 1.05,0 1.067,0.086 1.116,0.159 1.189,0.208 1.275,0.225 1.275,0.225 1.55,0.225
  Top Layer 1 region: 1.55,-1.175 1.275,-1.175 1.189,-1.158 1.116,-1.109 1.067,-1.036 1.05,-0.95 1.05,-0.95 1.067,-0.864 1.116,-0.791 1.189,-0.742 1.275,-0.725 1.275,-0.725 1.55,-0.725
  silkscreen extent -2.25,-1.75 1.55,1.75, body extent -1.65,-1.65 1.65,1.65, height 0.25
FP-DM3CS-SF-MFG [mm]
  rect 0.7x2 smd paste+0 mask+0: 1(3.2,-6.35) 2(2.1,-6.35) 3(1,-6.35) 4(-0.1,-6.35) 5(-1.2,-6.35) 6(-2.3,-6.35) 7(-3.4,-6.35) 8(-4.5,-6.35)
  rect 2.7x1.4 smd paste+0 mask+0: 9(-3.1,6.35) 10(1.8,6.35)
  rect 1.2x1.2 smd paste+0 mask+0: 11(4.85,6.45)
  rect 1x2.6 smd paste+0 mask+0: 12(-6.6,-5.85)
  rect 1.5x2.6 smd paste+0 mask+0: 13(6.75,-5.85)
  Keep-Out Layer region: -5.05,4.15 3.75,4.15 3.75,1.65 -5.05,1.65
  Keep-Out Layer region: 6.7,-0.75 7.3,-0.75 7.3,-4.55 6.7,-4.55
  Keep-Out Layer region: -6.9,-0.75 -6.3,-0.75 -6.3,-4.55 -6.9,-4.55
  silkscreen extent -7,-8.1 7,7.2, body extent -6.9,-7.05 6.9,7.05, height 2.13
FP-ERJPB3-IPC_C [mm]
  rect 0.657x0.862 smd paste+0 mask+0: 1(-0.701,0) 2(0.701,0)
  silkscreen extent -1.03,-0.87 1.03,0.87, body extent -0.8,-0.4 0.8,0.4, height 0.55
FP-EXBA-MFG [mm]
  rect 0.45x1.1 smd paste+0 mask+0: 1(-2.54,-1.65) 2(-1.27,-1.65) 3(0,-1.65) 4(1.27,-1.65) 5(2.54,-1.65) 6(2.54,1.65) 7(1.27,1.65) 8(0,1.65) 9(-1.27,1.65) 10(-2.54,1.65)
  silkscreen extent -3.3,-2.87 3.3,1.65, body extent -3.4,-2.3 3.4,2.3, height 0.25
FP-GJM155-0_05-IPC_C [mm]
  rect 0.515x0.472 smd paste+0 mask+0: 1(-0.379,0) 2(0.379,0)
  silkscreen extent -0.64,-0.67 0.64,0.67, body extent -0.74,-0.38 0.74,0.38, height 0.25
FP-GQM187-0_15-IPC_B [mm]
  rect 1.007x0.958 smd paste+0 mask+0: 1(-0.726,0) 2(0.726,0)
  silkscreen extent -1.23,-0.88 1.23,0.88, body extent -0.8,-0.4 0.8,0.4, height 0.8
FP-GRM188-0_2-IPC_C [mm]
  rect 0.905x0.906 smd paste+0 mask+0: 1(-0.601,0) 2(0.601,0)
  silkscreen extent -1.05,-0.9 1.05,0.9, body extent -0.8,-0.4 0.8,0.4, height 1
FP-LQFP144-1A-MFG [mm]
  rect 1.35x0.35 smd paste+0 mask+0: 1(-10.625,8.75) 2(-10.625,8.25) 3(-10.625,7.75) 4(-10.625,7.25) 5(-10.625,6.75) 6(-10.625,6.25) 7(-10.625,5.75) 8(-10.625,5.25) 9(-10.625,4.75) 10(-10.625,4.25) 11(-10.625,3.75) 12(-10.625,3.25) 13(-10.625,2.75) 14(-10.625,2.25) 15(-10.625,1.75) 16(-10.625,1.25) 17(-10.625,0.75) 18(-10.625,0.25) 19(-10.625,-0.25) 20(-10.625,-0.75) 21(-10.625,-1.25) 22(-10.625,-1.75) 23(-10.625,-2.25) 24(-10.625,-2.75) 25(-10.625,-3.25) 26(-10.625,-3.75) 27(-10.625,-4.25) 28(-10.625,-4.75) 29(-10.625,-5.25) 30(-10.625,-5.75) 31(-10.625,-6.25) 32(-10.625,-6.75) 33(-10.625,-7.25) 34(-10.625,-7.75) 35(-10.625,-8.25) 36(-10.625,-8.75) 73(10.625,-8.75) 74(10.625,-8.25) 75(10.625,-7.75) 76(10.625,-7.25) 77(10.625,-6.75) 78(10.625,-6.25) 79(10.625,-5.75) 80(10.625,-5.25) 81(10.625,-4.75) 82(10.625,-4.25) 83(10.625,-3.75) 84(10.625,-3.25) 85(10.625,-2.75) 86(10.625,-2.25) 87(10.625,-1.75) 88(10.625,-1.25) 89(10.625,-0.75) 90(10.625,-0.25) 91(10.625,0.25) 92(10.625,0.75) 93(10.625,1.25) 94(10.625,1.75) 95(10.625,2.25) 96(10.625,2.75) 97(10.625,3.25) 98(10.625,3.75) 99(10.625,4.25) 100(10.625,4.75) 101(10.625,5.25) 102(10.625,5.75) 103(10.625,6.25) 104(10.625,6.75) 105(10.625,7.25) 106(10.625,7.75) 107(10.625,8.25) 108(10.625,8.75)
  rect 0.35x1.35 smd paste+0 mask+0: 37(-8.75,-10.625) 38(-8.25,-10.625) 39(-7.75,-10.625) 40(-7.25,-10.625) 41(-6.75,-10.625) 42(-6.25,-10.625) 43(-5.75,-10.625) 44(-5.25,-10.625) 45(-4.75,-10.625) 46(-4.25,-10.625) 47(-3.75,-10.625) 48(-3.25,-10.625) 49(-2.75,-10.625) 50(-2.25,-10.625) 51(-1.75,-10.625) 52(-1.25,-10.625) 53(-0.75,-10.625) 54(-0.25,-10.625) 55(0.25,-10.625) 56(0.75,-10.625) 57(1.25,-10.625) 58(1.75,-10.625) 59(2.25,-10.625) 60(2.75,-10.625) 61(3.25,-10.625) 62(3.75,-10.625) 63(4.25,-10.625) 64(4.75,-10.625) 65(5.25,-10.625) 66(5.75,-10.625) 67(6.25,-10.625) 68(6.75,-10.625) 69(7.25,-10.625) 70(7.75,-10.625) 71(8.25,-10.625) 72(8.75,-10.625) 109(8.75,10.625) 110(8.25,10.625) 111(7.75,10.625) 112(7.25,10.625) 113(6.75,10.625) 114(6.25,10.625) 115(5.75,10.625) 116(5.25,10.625) 117(4.75,10.625) 118(4.25,10.625) 119(3.75,10.625) 120(3.25,10.625) 121(2.75,10.625) 122(2.25,10.625) 123(1.75,10.625) 124(1.25,10.625) 125(0.75,10.625) 126(0.25,10.625) 127(-0.25,10.625) 128(-0.75,10.625) 129(-1.25,10.625) 130(-1.75,10.625) 131(-2.25,10.625) 132(-2.75,10.625) 133(-3.25,10.625) 134(-3.75,10.625) 135(-4.25,10.625) 136(-4.75,10.625) 137(-5.25,10.625) 138(-5.75,10.625) 139(-6.25,10.625) 140(-6.75,10.625) 141(-7.25,10.625) 142(-7.75,10.625) 143(-8.25,10.625) 144(-8.75,10.625)
  silkscreen extent -12.02,-10.1 10.1,10.1, body extent -11.4,-11.4 11.4,11.4, height 0.25
FP-RC0603-0_55-IPC_C [mm]
  rect 0.659x0.812 smd paste+0 mask+0: 1(-0.677,0) 2(0.677,0)
  silkscreen extent -1.01,-0.85 1.01,0.85, body extent -0.8,-0.4 0.8,0.4, height 0.55
FP-RG1608-IPC_C [mm]
  rect 0.855x0.906 smd paste+0 mask+0: 1(-0.626,0) 2(0.626,0)
  silkscreen extent -1.05,-0.9 1.05,0.9, body extent -0.8,-0.4 0.8,0.4, height 0.5
FP-RNP0030A-MFG [mm]
  rrect40% 0.75x0.25 smd paste+0 mask+0: 1(-1.825,2.5) 2(-1.825,2) 3(-1.825,1.5) 4(-1.825,1) 5(-1.825,0.5) 6(-1.825,0) 7(-1.825,-0.5) 8(-1.825,-1) 9(-1.825,-1.5) 10(-1.825,-2) 11(-1.825,-2.5) 16(1.825,-2.5) 17(1.825,-2) 18(1.825,-1.5) 19(1.825,-1) 20(1.825,-0.5) 21(1.825,0) 22(1.825,0.5) 23(1.825,1) 24(1.825,1.5) 25(1.825,2) 26(1.825,2.5)
  rrect40% 0.25x0.6 smd paste+0 mask+0: 12(-0.75,-2.9) 13(-0.25,-2.9) 14(0.25,-2.9) 15(0.75,-2.9) 27(0.75,2.9) 28(0.25,2.9) 29(-0.25,2.9) 30(-0.75,2.9)
  rrect5% 2.2x4.6 smd paste-1000 mask+0: 31(0,0)
  silkscreen extent -2.9,-3.05 2.05,3.05, body extent -2.3,-3.3 2.3,3.3, height 0.25
FP-RP73P-1E-MFG [mm]
  rect 0.5x0.6 smd paste+0 mask+0: 1(-0.5,0) 2(0.5,0)
  silkscreen extent -0.53,-0.77 0.53,0.75, body extent -0.85,-0.4 0.85,0.4, height 0.25
FP-RT0603-IPC_C [mm]
  rect 0.659x0.812 smd paste+0 mask+0: 1(-0.677,0) 2(0.677,0)
  silkscreen extent -1.01,-0.85 1.01,0.85, body extent -0.76,-0.4 0.84,0.4, height 0.58
FP-RT0603-MFG [mm]
  rect 0.9x0.8 smd paste+0 mask+0: 1(-0.85,0) 2(0.85,0)
  silkscreen extent -0.85,-0.81 0.86,0.8, body extent -0.76,-0.4 0.84,0.4, height 0.58
FP-S3B-PH-SM4-TB_LF_SN-MFG [mm]
  rect 1x3.5 smd paste+0 mask+0: 1(-2,-3.25) 2(0,-3.25) 3(2,-3.25)
  rect 1.5x3.4 smd paste+0 mask+0: 4(-4.35,2.3) 5(4.35,2.3)
  silkscreen extent -4.95,-5.75 4.95,3.8, body extent -5.2,-5.1 5.2,4.1, height 0.25
FP-SMBJ-MFG [mm]
  rect 2.16x2.26 smd paste+0 mask+0: 1(-2.45,0) 2(2.45,0)
  silkscreen extent -4.25,-1.97 2.37,1.97, body extent -3.63,-2.07 3.63,2.07, height 0.25
FTSH10701LDVKTR [mm]
  rect 0.74x2.79 smd: 1(-3.81,-2.035) 2(-3.81,2.035) 3(-2.54,-2.035) 4(-2.54,2.035) 5(-1.27,-2.035) 6(-1.27,2.035) 7(0,-2.035) 8(0,2.035) 9(1.27,-2.035) 10(1.27,2.035) 11(2.54,-2.035) 12(2.54,2.035) 13(3.81,-2.035) 14(3.81,2.035)
  silkscreen extent -4.44,-4 4.44,0.4, body extent -4.44,-2.92 4.44,2.92, height 6.12
GCT_USB4940-00-A_REVA [mm]
  rect 0.6x1.15 smd paste+0 mask+0.102: A1_B12(-3.2,1.075) A4_B9(-2.4,1.075) B1_A12(3.2,1.075) B4_A9(2.4,1.075)
  rect 0.3x1.15 smd paste+0 mask+0.102: A5(-1.25,1.075) A6(-0.25,1.075) A7(0.25,1.075) A8(1.25,1.075) B5(1.75,1.075) B6(0.75,1.075) B7(-0.75,1.075) B8(-1.75,1.075)
  rect 2.18x2 smd paste+0 mask+0.102: SH1(-5.11,0.5) SH2(5.11,0.5) SH3(-5.11,-3.43) SH4(5.11,-3.43)
  round 0.65 hole 0.65 unplated mask+0: ""(-2.89,0) ""(2.89,0)
  silkscreen extent -4.47,-6.28 4.47,2.33
"JST- S2B-PH-SM4-TB(LF)(SN)-2_V" [mm] "SMD, 2-Leads, Body 7.9x7.6mm, Pitch 2mm"
  rect 1x3.5 smd: 1(-1,3.45) 2(1,3.45)
  rect 1.5x3.4 smd: MP1(-3.35,-2.3) MP2(3.35,-2.3)
  silkscreen extent -3.95,-3.8 3.95,5.87, body extent -3.95,-3.8 3.95,4.8, height 5.6
RESC1608X50N [mm]
  rect 0.85x1 smd: 1(-0.75,0) 2(0.75,0)
  body extent -0.77,-0.43 0.78,0.42, height 0.45
SBRT10U50SP513 [mm]
  rect 1.39x1.4 smd: 1(-0.92,-2.77) 2(0.92,-2.77)
  rect 3.36x4.86 smd: 3(0,1.212)
  silkscreen extent -2,-3.9 1.98,2.8, body extent -1.98,-3.33 1.98,3.31, height 1.25
SODFL3718X102N [mm]
  rect 1.09x1.11 smd: 1(-1.575,0) 2(1.575,0)
  silkscreen extent -2.12,-0.9 1.38,0.9, body extent -1.85,-0.9 1.85,0.9, height 1.02
SOIC127P600X175-8N [mm]
  rect 1.525x0.65 smd: 1(-2.712,1.905) 2(-2.712,0.635) 3(-2.712,-0.635) 4(-2.712,-1.905) 5(2.712,-1.905) 6(2.712,-0.635) 7(2.712,0.635) 8(2.712,1.905)
  silkscreen extent -3.47,-2.45 1.6,2.58, body extent -3,-2.45 3,2.45, height 1.75
SON127P800X600X80-9N-D [mm]
  rect 0.95x0.45 smd: 1(-3.9,1.905) 2(-3.9,0.635) 3(-3.9,-0.635) 4(-3.9,-1.905) 5(3.9,-1.905) 6(3.9,-0.635) 7(3.9,0.635) 8(3.9,1.905)
  rect 3.45x4.35 smd: 9(0,0)
  silkscreen extent -4.5,2.51 -4.25,2.76, body extent -4.05,-3 4.05,3, height 0.8
SOT95P280X145-6N [mm]
  rect 1.2x0.6 smd: 1(-1.25,0.95) 2(-1.25,0) 3(-1.25,-0.95) 4(1.25,-0.95) 5(1.25,0) 6(1.25,0.95)
  silkscreen extent -1.85,-1.46 0.3,1.6, body extent -1.4,-1.46 1.4,1.46, height 1.45
WL-SMCD_0603 [mm] "SMD Mono-color Chip LED, body 1.6x0.8mm"
  rect 0.8x0.75 smd: 1(-1270.8,-1270) 2(-1269.2,-1270)
  silkscreen extent -1271.62,-1270.4 -1269.78,-1269.6, body extent -1270.8,-1270.4 -1269.2,-1269.6, height 0.42
WL-SMCW_0603_150060xx75000 [mm] "SMD Mono-color Chip LED, body 1.6x0.8mm"
  rect 0.8x0.8 smd: 1(-0.8,0) 2(0.8,0)
  silkscreen extent -1.55,-0.4 -1.4,0.4, body extent -0.8,-0.4 0.8,0.4, height 0.7
WL-SMCW_0603_150060xx75020 [mm] "SMD Mono-color Chip LED, body 1.6x0.8mm"
  rect 0.8x0.8 smd: 1(-0.8,0) 2(0.8,0)
  silkscreen extent -1.62,-0.08 -1.48,0.07, body extent -0.8,-0.4 0.8,0.4, height 0.25

## Part data
C1 C2 C16 C20 C24 C26 C27 C28 C29 C30 C31 C32 C33 C34 C35 C36 C38 C47 C71: library part CMP-13271-002683-1, "Cap Ceramic 100nF 16V X7R ±10% Pad SMD 0603 +125°C T/R / CL10B104KO8WPNC", Capacitance=100nF, Case Code (Imperial)=0603, Case Code (Metric)=1608, Max Operating Temperature=125°C, Min Operating Temperature=-55°C, Ratings=AEC-Q200, Tolerance=10%, Voltage Rating=16V, Case/Package=0603, Features="Soft Termination", Length=0.063inch, Mount="Surface Mount", Packaging="Tape and Reel", Thickness=0.035inch, Width=0.031inch
C3 C4: library part CMP-06035-061124-1, "GQM1875C2E4R0BB12D / Ceramic Capacitor 4pF ±0.1pF 250VDC C0G 0603 Paper T/R", Case Code (Imperial)=0603, Case Code (Metric)=1608, Dielectric=C0G, Max Operating Temperature=125°C, Min Operating Temperature=-55°C, Package Quantity=4000, Voltage Rating=250V, Capacitance=4pF, Case/Package=0603, Construction=Flat, Depth=0.8mm, Height=0.7mm, Length=1.6mm, Mount="Surface Mount", Packaging="Tape and Reel", Radiation Hardening=No, Series=GQM, Termination=SMD/SMT, Thickness=0.031inch, Voltage Rating (DC)=250V, Width=0.8mm
C5 C6: library part CMP-03020-023157-1, "C0603 1.5 pF X8R 30ppm/°C 0.1 pF 25 V / C0603C159B3HACTU", Capacitance="1.5 pF", Manufacturer=KEMET, Manufacturer Part Number=C0603C159B3HACTU, Package=C0603C-CF, Temperature="-55°C to +125°C", Temperature Characteristic=X8R, Temperature Coefficient=30ppm/°C, Temperature Range High=+125°C, Temperature Range Low=-55°C, Tolerance="0.1 pF", Voltage Rating="25 V", Automotive=Yes, Automotive Grade="Grade 1", Category=Cap, ComponentLink2Description=Datasheet, ComponentLink2URL=https://api.kemet.com/component-edge/download/datasheet/C0603C100J5GACAUTO.pdf, Device Class L1="Passive Components", Device Class L2=Capacitors, Device Class L3="Ceramic Capacitors", Height=0.87mm, Lead Free=Yes, Material=Ceramic, Octopart=https://octopart.com/c0603c159b3hactu-kemet-88725126, RoHS=TRUE
C7: library part CMP-2008-03910-2, "Multi-Layer Ceramic Capacitor 0.75pF C0G  ±0.1pF 0402 Paper T/R", Capacitance=0.75pF, Case Code (Imperial)=0402, Case Code (Metric)=1005, Dielectric=C0G, Max Operating Temperature=125°C, Min Operating Temperature=-55°C, Package Quantity=1, Voltage Rating=50V, Case/Package=0402, Construction=Flat, Depth=0.5mm, Height=0.5mm, Lead Free="Lead Free", Length=1mm, Mount="Surface Mount", Packaging="Tape and Reel", Radiation Hardening=No, Series=GJM, Termination=SMD/SMT, Thickness=0.022inch, Voltage Rating (DC)=50V, Width=0.02inch
C8: library part CMP-001-00127-1, "Cap Ceramic 0.1uF 25V X7R 5% SMD 0805 FlexiTerm 125°C Paper T/R", Case/Package=0805, Max Operating Temperature=125°C, Min Operating Temperature=-55°C, Tolerance=5%, Voltage Rating=25V, Mounting Technology="Surface Mount", Pins=2
C11 C13 C14: library part CMP-06035-043613-1, "GRM188R61H225ME11J Chip Multilayer Ceramic Capacitors for General Purpose, 0603, 2.2uF, X5R, 15%, 20%, 50V"
C12 C15 C18: library part CMP-14477-000175-2, "UMK107ABJ474KA-T", Capacitance=470nF, Case Code (Imperial)=0603, Case Code (Metric)=1608, Dielectric=X5R, Max Operating Temperature=85°C, Min Operating Temperature=-55°C, Package Quantity=1, Tolerance=10%, Voltage=50V, Case/Package=0603, Construction=Flat, Depth=0.8mm, Height=0.8mm, Lead Free="Lead Free", Length=1.6mm, Mount="Surface Mount", Packaging="Tape and Reel", Radiation Hardening=No, RoHS Compliant=Yes, Series=M, Termination=SMD/SMT, Thickness=0.037inch, Voltage Rating=50V, Voltage Rating (DC)=50V, Width=0.8mm
C19 C37 C39: library part CMP-13271-003287-1, "Cap Ceramic 10uF 16V X6S ±20% Pad SMD 0603 +105°C T/R / CL10X106MO8NRNC", Case Code (Imperial)=0603, Case Code (Metric)=1608, Max Operating Temperature=105°C, Min Operating Temperature=-55°C, Tolerance=20%, Voltage Rating=16V, Capacitance=10uF, Case/Package=0603, Length=0.063inch, Mount="Surface Mount", Packaging="Tape and Reel", Thickness=0.035inch, Width=0.031inch
C21 C22: library part CMP-13271-003360-1, "Cap Ceramic 2.2uF 16V X5R ±10% Pad SMD 0603 +85°C T/R / CL10A225KO8NNND", Capacitance=2.2nF, Case/Package=0603, Dielectric=X5R, Max Operating Temperature=85°C, Min Operating Temperature=-55°C, Tolerance=10%, Voltage Rating (DC)=16V, Depth=0.8mm, Length=1.6mm, Packaging="Tape and Reel", Radiation Hardening=No
C23 C46 C46_CANTransceiver2 C48: library part CMP-13271-000784-1, "Cap Ceramic 1uF 16V X7R ±10% Pad SMD 0603 +125°C T/R / CL10B105KO8NNNL", Case/Package=0603, Dielectric=X7R, Max Operating Temperature=125°C, Min Operating Temperature=-55°C, Package Quantity=15000, Tolerance=10%, Voltage Rating=16V, Capacitance=1uF, Depth=0.8mm, Height=0.8mm, Lead Free="Lead Free", Length=1.6mm, Mount="Surface Mount", Packaging="Tape and Reel", Radiation Hardening=No, Thickness=0.035inch, Voltage Rating (DC)=16V, Width=0.031inch
C25: library part CMP-08246-005518-1, "Multilayer Ceramic Capacitors 4.7μF ±10% 25V X5R SMD 0603 / C1608X5R1E475K080AC", Case Code (Imperial)=0603, Case Code (Metric)=1608, Dielectric=X5R, Dielectric Material=Ceramic, Max Operating Temperature=85°C, Min Operating Temperature=-55°C, Package Quantity=4000, Tolerance=10%, Voltage Rating=25V, Capacitance=4.7uF, Case/Package=0603, Construction=Flat, Depth=0.8mm, Height=0.8mm, Lead Free="Lead Free", Length=1.6mm, Mount="Surface Mount", Packaging="Tape and Reel", REACH SVHC="No SVHC", Resistor Type=Ceramic, RoHS Compliant=Yes, Series=C, Termination=SMD/SMT, Thickness=0.039inch, Voltage Rating (DC)=25V, Weight=7.1E-05oz, Width=0.031inch
D1: library part CMP-1426-00001-3, Case Code (Imperial)=0603, Case Code (Metric)=1608, Color=Red, Forward Current=100mA, Forward Voltage=2V, Max Junction Temperature (Tj)=95°C, Max Operating Temperature=85°C, Max Reverse Voltage (DC)=5V, Min Operating Temperature=-40°C, Power Dissipation=72mW, Test Current=20mA, Case/Package=0603, Dominant Wavelength=625nm, Height=700µm, Length=1.6mm, Lens Style="Clear, Rectangular", Luminous Intensity=250mcd, Mount="Surface Mount", NexarPartId=29717776, Packaging="Tape and Reel", Peak Wavelength=630nm, REACH SVHC=Unknown, Reverse Voltage=5V, RoHS=Compliant, Viewing Angle=140°, Wavelength=625nm, Width=800µm
D2: library part CMP-03913-90235563-2, "150060GS55040 WL-SMCD SMT Mono-color Chip LED Diffused", Forward Current=60mA, Forward Voltage=3.2V, Max Operating Temperature=85°C, Max Reverse Voltage (DC)=5V, Min Operating Temperature=-40°C, Dominant Wavelength=525nm, Height=400µm, Length=1.6mm, Luminous Intensity=430mcd, NexarPartId=90235563, Packaging="Tape and Reel", Peak Wavelength=520nm, RoHS=Compliant, Viewing Angle=140°, Wavelength=525nm, Width=800µm
D3: library part CMP-03913-104891429-2, "WL-SMCW SMT Mono-Color Chip LED Waterclear super f", Forward Current=60mA, Forward Voltage=2V, Max Operating Temperature=85°C, Max Reverse Voltage (DC)=5V, Min Operating Temperature=-40°C, Dominant Wavelength=590nm, Height=250µm, Length=1.6mm, Luminous Intensity=130mcd, Peak Wavelength=595nm, RoHS=Compliant, Viewing Angle=140°, Width=800µm
D4: library part CMP-90577-000001-1, "Schottky Diodes & Rectifiers SOT23CA.0.2A 30V Sch ottky", Capacitance=10pF, Case/Package=SOT-23, Current Rating=200mA, Forward Voltage=1V, Voltage Rating (DC)=30V, Lead Free="Lead Free", Number of Pins=3, Packaging="Tape and Reel", REACH SVHC="No SVHC"
D5: library part CMP-2000-07095-2, "TVS DIODE 33V 53.3V DO214AA", Breakdown Voltage=36.7V, Clamping Voltage=53.3V, Manufacturer="Littelfuse Inc", Max Junction Temp=+150°C, Package=SMBJ, Peak Pulse Current=11.3A, Peak Pulse Power=600W, Reverse Standoff Voltage=33V, Temperature="-65°C to +150°C", Temperature Range Low=-65°C, Automotive=No, Category=Diode, ComponentLink2Description=Datasheet, ComponentLink2URL=https://www.littelfuse.com/~/media/electronics/datasheets/tvs_diodes/littelfuse_tvs_diode_smbj_datasheet.pdf.pdf, Device Class L1="Circuit Protection", Device Class L2="TVS Diodes", Device Class L3=unset, Digikey Description="TVS DIODE 33V 53.3V DO214AA", Direction=Unidirectional, Height=2.61mm, Lead Free=Yes, Manufacturer Part Number=SMBJ33A, Mouser Description="TVS DIODE 33V 53.3V DO214AA", Number of Channels=1, Octopart=https://octopart.com/smbj33a-littelfuse-350829, RoHS=TRUE, Temperature Range High=+150°C
D6: "Diode", Manufacturer_Name="Diodes Incorporated", Mouser Part Number=621-SBRT10U50SP5-13, Arrow Part Number=SBRT10U50SP5-13, Arrow Price/Stock=https://www.arrow.com/en/products/sbrt10u50sp5-13/diodes-incorporated, Datasheet Link=https://www.diodes.com/assets/Datasheets/SBRT10U50SP5.pdf, Height=1.15mm, Manufacturer_Part_Number=SBRT10U50SP5-13, Mouser Price/Stock=https://www.mouser.co.uk/ProductDetail/Diodes-Incorporated/SBRT10U50SP5-13?qs=M%2FOdCRO8QQ2p%252BnTDeuohyA%3D%3D
D7: "Diode", Manufacturer_Name="Taiwan Semiconductor", Mouser Part Number=821-SS34LWHRVG, Arrow Part Number=SS34LWHRVG, Arrow Price/Stock=https://www.arrow.com/en/products/ss34lwhrvg/taiwan-semiconductor?region=asia, Datasheet Link=https://datasheet.datasheetarchive.com/originals/distributors/DKDS-20/389381.pdf, Height=1.02mm, Manufacturer_Part_Number=SS34LWHRVG, Mouser Price/Stock=https://www.mouser.co.uk/ProductDetail/Taiwan-Semiconductor/SS34LWHRVG?qs=5aG0NVq1C4zYvYQjFNyRbA%3D%3D
FB1: "Ferrite Bead", Manufacturer_Name=TDK, Mouser Part Number=810-MPZ2012S101AT000, Arrow Part Number=MPZ2012S101AT000, Arrow Price/Stock=https://www.arrow.com/en/products/mpz2012s101at000/tdk?utm_currency=USD&region=europe, Datasheet Link=https://product.tdk.com/system/files/dam/doc/product/emc/emc/beads/catalog/beads_commercial_power_mpz2012_en.pdf, Height=1.05mm, Manufacturer_Part_Number=MPZ2012S101AT000, Mouser Price/Stock=https://www.mouser.co.uk/ProductDetail/TDK/MPZ2012S101AT000?qs=pLY5GE0xrmKpe1XYPmVCHA%3D%3D
IC1 IC2: "Integrated Circuit", Manufacturer_Name="Texas Instruments", Mouser Part Number=595-TCAN3414DR, Arrow Part Number=TCAN3414DR, Arrow Price/Stock=https://www.arrow.com/en/products/tcan3414dr/texas-instruments?region=nac, Datasheet Link=https://www.ti.com/lit/ds/symlink/tcan3414.pdf?ts=1713723144569&ref_url=https%253A%252F%252Fwww.mouser.ch%252F, Height=1.75mm, Manufacturer_Part_Number=TCAN3414DR, Mouser Price/Stock=https://www.mouser.co.uk/ProductDetail/Texas-Instruments/TCAN3414DR?qs=mELouGlnn3egF2AojRJddw%3D%3D
IC2: "Integrated Circuit", Manufacturer_Name=Winbond, Manufacturer_Part_Number="W25Q01JVZEIM TU", Mouser Part Number=454-W25Q01JVZEIMTU, Datasheet Link=https://www.mouser.jp/datasheet/2/949/W25Q01JV_SPI_RevB_11132019-1760416.pdf, Height=0.8mm, Mouser Price/Stock=https://www.mouser.co.uk/ProductDetail/Winbond/W25Q01JVZEIM-TU/?qs=YwPsRIUVAOcsCshGUAsYXg%3D%3D
IC3: "Integrated Circuit", Manufacturer_Name=STMicroelectronics, Mouser Part Number=511-USBLC6-2SC6, Arrow Part Number=USBLC6-2SC6, Arrow Price/Stock=https://www.arrow.com/en/products/usblc6-2sc6/stmicroelectronics?utm_currency=USD&region=europe, Datasheet Link=https://www.st.com/resource/en/datasheet/usblc6-2.pdf, Height=1.45mm, Manufacturer_Part_Number=USBLC6-2SC6, Mouser Price/Stock=https://www.mouser.co.uk/ProductDetail/STMicroelectronics/USBLC6-2SC6?qs=po45yt2pPpu%2FhNIlwQdTlg%3D%3D
J1: "Connector", Manufacturer_Name=SAMTEC, Mouser Part Number=200-FTSH10701LDVKTR, Arrow Part Number=FTSH-107-01-L-DV-K-TR, Arrow Price/Stock=https://www.arrow.com/en/products/ftsh-107-01-l-dv-k-tr/samtec?utm_currency=USD&region=nac, Datasheet Link=https://suddendocs.samtec.com/prints/ftsh-1xx-xx-xxx-dv-xxx-xxx-x-xx-mkt.pdf?_gl=1*mdiyn1*_ga*MTcyMTUxMTIwMy4xNzEyMDQxMTc2*_ga_3KFNZC07WW*MTcxMjEzMDIxOS4yLjEuMTcxMjEzMDI1NC4yNS4wLjA., Height=6.25mm, Manufacturer_Part_Number=FTSH-107-01-L-DV-K-TR, Mouser Price/Stock=https://www.mouser.co.uk/ProductDetail/Samtec/FTSH-107-01-L-DV-K-TR?qs=%252BZP6%2F%252BtExtDlh0wyxE013Q%3D%3D
J2: library part CMP-00257-07672643-1, "43650-0205 Conn Wire to Board HDR 2 POS 3mm Solder RA Side Entry Thru-Hole Micro-Fit 3.0™ Tray", Current Rating=5A, Manufacturer Lifecycle Status=ACTIVE, Voltage Rating=600V, Contact Material=Brass, Contact Plating=Gold, Country of Origin=US, Gender=Male, Glow Wire Compliant=Compliant, Halogen Free="Low Halogen", Housing Material=Thermoplastic, Lifecycle Status=Production, NexarPartId=7672643, Number of Circuits=2, Number Of Contacts=2, Number of Positions=2, Number Of Rows=1, Orientation="Right Angle", Pitch=3mm, Plating=Tin, RoHS=Compliant, Termination="Through Hole"
J3: library part CMP-002-00134-1, "Type C USB 2.0 Connector", Case/Package=None, Check_prices=https://www.snapeda.com/parts/USB4940-00-A/Global+Connector+Technology/view-part/?ref=eda, Component Type=Standard, Design Item ID=USB4940-00-A_REVA, MF="Global Connector Technology", MP=USB4940-00-A, Pins=16, SnapEDA_Link=https://www.snapeda.com/parts/USB4940-00-A/Global+Connector+Technology/view-part/?ref=snap, Source=USB4940-00-A_REVA.SchLib
J5: library part CMP-11597-000003-1, "CONN MICRO SD CARD HINGED TYPE", Contact Resistance=100mR, Current Rating=500mA, Flammability Rating="UL94 V-0", Insulation Resistance=1GR, Max Operating Temperature=85°C, Min Operating Temperature=-25°C, Package Quantity=1, Voltage Rating (AC)=125V, Connector Type=Connector, Contact Material=Gold, Contact Plating=Gold, Depth=1.83mm, Gender=Female, Housing Material=Polymer, Lead Free="Lead Free", Length=14.1mm, Max Current Rating=500mA, Mount="Surface Mount", Number Of Contacts=8, Number of Positions=8, Number Of Rows=1, Orientation="Right Angle", Packaging="Tape and Reel", Pitch=1.1mm, Radiation Hardening=No, Termination=Solder, Width=13.8mm
J7_CANTransceiver J7_CANTransceiver2 J8_CANTransceiver J8_CANTransceiver2: library part CMP-002-00113-1, "Connector Header, PH Series, 3 Position, Side Entry, 2.00mm, Solder, Surface Mount, Natural.", Max Current Rating=2A, Max Operating Temperature=85°C, Min Operating Temperature=-25°C, Voltage Rating=100V, Connector Type="Male Pin", Gender=Male, Mounting Technology="Surface Mount", Pins=3
L2: library part CMP-2000-05082-1, "Shielded Power Inductor, 10 uH, +/- 20%, 10 A, -55 to 125 degC, 2-Pin SMD, RoHS, Tape and Reel", Current - Saturation=16A, Current Rating=10A, DC Resistance (DCR)=16.8mOhmMax, Frequency - Self Resonant=10MHz, Frequency - Test=100kHz, Inductance=10µH, Manufacturer=Bourns, Operating Temperature=-55degC~125degC, Package / Case=Nonstandard, Standard Package=400, Tolerance=±20%, 3D Model=SRP1270.stp, Category=Inductors,Coils,Chokes, Datasheet URL=https://datasheet.ciiva.com/11802/0900766b80f2b679-11802877.pdf, Datasheet Version=Dec-12, EDA / CAD Models=DownloadfromAcceleratedDesigns, Family=FixedInductors, Height - Seated (Max)="0.276\"(7.00mm)", Manufacturer URL=http://www.bourns.com/, Material - Core=Iron, Mounting Type=SurfaceMount, Online Catalog=SRPSeries, Other Names="SRP1270-100M-ND / SRP1270-100MTR / SRP1270100M", Packaging=Tape&Reel(TR), RoHS Information=SRP1270SeriesMaterialDeclaration, Series=SRP1270, Shielding=Shielded, Size / Dimension="0.539\"Lx0.539\"W(13.70mmx13.70mm)", Type=Wirewound
P1: library part CMP-002-00031-2, "Male Header, Pitch 2 mm, 1 x 2 Position, Height 5.5 mm, -25 to 85 degC, RoHS, Tape and Reel", Case/Package=S2B-PH-SM4-TB(LF)(SN)-2, Manufacturer=JST, Max Operating Temperature=85°C, Min Operating Temperature=-25°C, Package Description="Male Header, Pitch 2 mm, 1 x 2 Position, Height 5.5 mm", Connector Type=Header, Datasheet URL=http://www.jst-mfg.com/product/pdf/eng/ePH.pdf, Datasheet Version=Dec-12, Gender=Male, Manufacturer URL=http://www.jst.com/home2.html, Mounting Technology=SM, Package Reference=S2B-PH-SM4-TB(LF)(SN)-2, RoHS Compliant=Unknown
R1 R2 R3 R14 R14_CANTransceiver2 R15 R15_CANTransceiver2: library part CMP-03412-005349-1, "RES SMD 10K OHM 1% 1/10W 0603 / RT0603FRE0710KL", Manufacturer=Yageo, Manufacturer Part Number=RT0603FRE0710KL, Package=RT0603, Power Rating=0.1W, Resistance=10KΩ, Temperature="-55°C to +155°C", Temperature Coefficient="50 ppm/°C", Temperature Range High=+155°C, Temperature Range Low=-55°C, Tolerance=0.01, Voltage Rating=75V, Automotive=No, Category=Res, ComponentLink2Description=Datasheet, ComponentLink2URL=http://www.yageo.com/documents/recent/PYu-RT_1-to-0.01_RoHS_L_9.pdf, Composition="Thin Film", Device Class L1="Passive Components", Device Class L2=Resistors, Device Class L3="Chip SMD Resistors", Digikey Description="RES SMD 10K OHM 1% 1/10W 0603", Footprint Url=http://www.yageo.com/exep/pages/download/literatures/PYu-R_Mount_10.pdf, Height=0.55mm, Ipc Land Pattern Name=RESC16080X45, Lead Free=Yes, Mouser Description="Thin Film Resistors - SMD 10K ohm 1% 1/10W", Octopart=https://octopart.com/rt0603fre0710kl-yageo-40009243, RoHS=TRUE, Series=RT
R4 R5 R6: library part CMP-03412-038529-1, "AF0603JR-07220RL Anti-Sulfurated Chip Resistors Automotive Grade 220Ω 5% 100ppm/°C 0603", Case/Package=0603, Max Operating Temperature=155°C, Max Power Dissipation=100mW, Min Operating Temperature=-55°C, Resistance=220R, Resistor Type="Thick Film", Temperature Coefficient=100ppm/°C, Tolerance=5%, Features="Moisture Resistant", Height=0.022inch, Lead Free="Lead Free", Length=0.063inch, Number of Terminations=2, Packaging="Tape and Reel", RoHS Compliant=Yes, Series=AF, Width=0.031inch
R7: library part CMP-03412-030646-1, "RT0603 100Ω 0.1W 50 ppm/°C 1.00% RT0603FRE07100RL", Manufacturer=Yageo, Manufacturer Part Number=RT0603FRE10100RL, Package=RT0603, Power Rating=0.1W, Resistance=100Ω, Temperature="-55°C to +155°C", Temperature Coefficient="50 ppm/°C", Temperature Range High=+155°C, Temperature Range Low=-55°C, Tolerance=0.01, Voltage Rating=75V, Automotive=No, Category=Res, ComponentLink2Description=Datasheet, ComponentLink2URL=http://www.yageo.com/documents/recent/PYu-RT_1-to-0.01_RoHS_L_9.pdf, Composition="Thin Film", Device Class L1="Passive Components", Device Class L2=Resistors, Device Class L3="Chip SMD Resistors", Footprint Url=http://www.yageo.com/exep/pages/download/literatures/PYu-R_Mount_10.pdf, Height=0.55mm, Ipc Land Pattern Name=RESC16080X45, Lead Free=Yes, Octopart=https://octopart.com/rt0603fre10100rl-yageo-22252409, RoHS=TRUE, Series=RT
R8 R17: library part CMP-03211-011177-1, "RP73P 0402 165Ω 0.1W 25ppm/°C 0.10% 50V", Manufacturer="TE Connectivity", Manufacturer Part Number=RP73PF1E165RBTD, Package=RP73P-1E, Power Rating=0.1W, Resistance=165Ω, Temperature="-55°C to +155°C", Temperature Coefficient=25ppm/°C, Temperature Range High=+155°C, Temperature Range Low=-55°C, Tolerance=0.10%, Voltage Rating=50V, Automotive=No, Category=Res, ComponentLink2Description=Datasheet, ComponentLink2URL=https://www.te.com/commerce/DocumentDelivery/DDEController?Action=srchrtrv&DocNm=1773272&DocType=DS&DocLang=English, Composition="Thin Film", Device Class L1="Passive Components", Device Class L2=Resistors, Device Class L3="Chip SMD Resistors", Height=0.35mm, Ipc Land Pattern Name=RESC10050X30, Lead Free=Yes, Octopart=https://octopart.com/rp73pf1e165rbtd-te+connectivity-89229973, RoHS=TRUE, Series=RP73P
R9 R10: library part CMP-2100-03662-2, "RC0603FR-07100KL RES SMD 100K OHM 1% 1/10W 0603", Case Code (Imperial)=0603, Case Code (Metric)=1608, Max Operating Temperature=155°C, Max Power Dissipation=100mW, Min Operating Temperature=-55°C, Resistance=100kR, Resistance Tolerance=1%, Resistor Type="Thick Film", Temperature Coefficient=100ppm/°C, Voltage Rating=50V, Working Voltage=75V, Case/Package=0603, Construction=Rectangular, Depth=0.8mm, Features="Moisture Resistant", Height=0.45mm, Lead Free="Lead Free", Length=1.6mm, Military Standard=Not, Number of Pins=2, Number of Terminations=2, Packaging="Tape and Reel", Power Rating=100mW, REACH SVHC="No SVHC", RoHS Compliant=Yes, Series=RC, Technology="THICK FILM", Termination=SMD/SMT, Tolerance=1%, Voltage Rating (DC)=50V, Width=0.8mm
R11: library part CMP-2000-02140-2, "RG1608P-2492-B-T5 / Automotive Metal Thin Film Chip Resistor, 0603, 24.9kΩ, 0.1%, 25ppm/°C, 0.1W, 100V", Case Code (Imperial)=0603, Case Code (Metric)=1608, Max Operating Temperature=155°C, Max Power Dissipation=100mW, Min Operating Temperature=-55°C, Package Quantity=1, Resistance=24.9kR, Resistor Type="Thin Film", Temperature Coefficient=25ppm/°C, Tolerance=0.1%, Voltage Rating=100V, Voltage Rating (DC)=75V, Case/Package=0603, Features="Automotive AEC-Q200", Height=0.02inch, Lead Free="Lead Free", Length=0.063inch, Number of Terminations=2, Packaging="Tape and Reel", Power Rating=100mW, RoHS Compliant=Yes, Series=RG, Size Code=0603, Termination=SMD/SMT, Weight=7.1E-05oz, Width=0.8mm
R12: library part CMP-03412-029582-1, "RT0603BRD07147KL / RES SMD 147K OHM 0.1% 1/10W 0603", Manufacturer=Yageo, Manufacturer Part Number=RT0603BRD07147KL, Package=RT0603, Power Rating=0.1W, Resistance=147KΩ, Temperature="-55°C to +155°C", Temperature Coefficient="25 ppm/°C", Temperature Range High=+155°C, Temperature Range Low=-55°C, Tolerance=0.001, Voltage Rating=75V, Automotive=No, Category=Res, ComponentLink2Description=Datasheet, ComponentLink2URL=http://www.yageo.com/documents/recent/PYu-RT_1-to-0.01_RoHS_L_9.pdf, Composition="Thin Film", Device Class L1="Passive Components", Device Class L2=Resistors, Device Class L3="Chip SMD Resistors", Digikey Description="RES SMD 147K OHM 0.1% 1/10W 0603", Footprint Url=http://www.yageo.com/exep/pages/download/literatures/PYu-R_Mount_10.pdf, Height=0.55mm, Ipc Land Pattern Name=RESC16080X45, Lead Free=Yes, Mouser Description="Res Thin Film 0603 147K Ohm 0.1% 1/10W ±25ppm/°C Molded SMD Paper T/R", Octopart=https://octopart.com/rt0603brd07147kl-yageo-1187208, RoHS=TRUE, Series=RT
R13: library part CMP-05422-000107-1, "ERJ-PB3B1002V / RES SMD 10K OHM 0.1% 1/5W 0603", Case Code (Imperial)=0603, Case Code (Metric)=1608, Max Operating Temperature=155°C, Max Power Dissipation=200mW, Min Operating Temperature=-55°C, Resistance=10kR, Resistor Type="Thick Film", Temperature Coefficient=50ppm/°C, Tolerance=0.1%, Case/Package=0603, Features="Automotive AEC-Q200", Height - Seated (Max)=0.022inch, Length=0.063inch, Number of Terminations=2, Packaging="Tape and Reel", Width=0.032inch
R16 R16_CANTransceiver2: library part CMP-03412-039700-1, "Anti-Sulfurated Chip Resistors Automotive Grade 120Ω 1% 100ppm/°C 0603 AF0603FR-07120RL", Case/Package=0603, Max Operating Temperature=155°C, Max Power Dissipation=100mW, Min Operating Temperature=-55°C, Resistance=120R, Resistor Type="Thick Film", Temperature Coefficient=100ppm/°C, Tolerance=1%, Features="Moisture Resistant", Height=0.022inch, Length=0.063inch, Number of Terminations=2, Packaging="Tape and Reel", RoHS Compliant=Yes, Series=AF, Width=0.031inch
R18 R19: library part CRCW060356K0JNEA, "Resistor / CRCW060356K0JNEA", Manufacturer_Name=Vishay, Mouser Part Number=71-CRCW060356K0JNEA, Datasheet Link=http://www.vishay.com/docs/20035/dcrcwe3.pdf, Height=0.5mm, Manufacturer_Part_Number=CRCW060356K0JNEA, Mouser Price/Stock=https://www.mouser.co.uk/ProductDetail/Vishay-Dale/CRCW060356K0JNEA?qs=H7dztQFVN2myA%252B1F5t9CIw%3D%3D
RN1: library part CMP-00287-42270834-1, "EXB-A10P103J Res Thick Film NET 10K Ohm 5% ±200ppm/℃ BUS Molded 10-Pin 2512 Concave SMD Embossed Carrier T/R", Case Code (Imperial)=2512, Case Code (Metric)=6432, Max Operating Temperature=125°C, Min Operating Temperature=-55°C, Number of Resistors=8, Power Dissipation=63mW, Power Per Element=62.5mW, Resistance=10kΩ, Temperature Coefficient=200ppm/°C, Tolerance=5%, Voltage Rating=50V, Voltage Rating (DC)=100V, Case/Package=2512, Circuit Type=Bussed, Depth=3.1mm, Height=660.4µm, Lead Free="Lead Free", Length=6.4mm, Lifecycle Status=Production, Military Standard=Not, Mount="Surface Mount", NexarPartId=42270834, Number Of Contacts=10, Number of Elements=8, Number of Pins=10, Number of Terminals=10, Packaging="Cut Tape", Radiation Hardening=No, REACH SVHC=Unknown, RoHS=Compliant, Terminal Pitch=1.27mm, Termination=Concave, Width=3.1mm
U1: library part CMP-12105-000009-1, "LQFP 144 20X20X1.4 2", Ambient Temperature Range High=+85°C, Ambient Temperature Range Low=-40°C, Frequency=480MHz, Manufacturer=STMicroelectronics, Max Junction Temp=+125°C, Max Supply Voltage=3.6V, Min Supply Voltage=1.62V, Package=LQFP144-1A, Temperature="-40°C to +125°C", Automotive=No, Category=IC, ComponentLink2Description=Datasheet, ComponentLink2URL=https://www.st.com/resource/en/datasheet/stm32h753zi.pdf, Core Architecture="ARM Cortex-M7", Data Bus Width=32bits, Device Class L1="Integrated Circuits (ICs)", Device Class L2="Embedded Processors and Controllers", Device Class L3=Microcontrollers, Digikey Description="LQFP 144 20X20X1.4 2", Height=1.6mm, Interface=I2C,SPI,UART,USART,CAN,USB,LIN,IrDA,Ethernet,I2S,SMBus,Other, Lead Free=Yes, Manufacturer Part Number=STM32H753ZIT6, Memory Size=2MBytes, Memory Type=FLASH, Mouser Description="MCU 32-Bit STM32 ARM Cortex M7 RISC 2MB Flash 1.8V/2.5V/3.3V 144-Pin LQFP Tray", Number Of A/D Converters=3, Number Of Adc Channels=36, Number Of Cores=1, Number Of Ethernet Channels=1, Number Of I2C Channels=4, Number Of I/Os=114, Number Of Pwm Channels=24, Number Of Spi Channels=6, Number Of Timers/Counters=20, Number Of Uart Channels=9, Number Of Usb Channels=2, Octopart=https://octopart.com/stm32h753zit6-stmicroelectronics-87879771, Ram Size=1MBytes, RoHS=TRUE, Standoff Height=0.05mm, Temperature Range High=+125°C, Temperature Range Low=-40°C
U2: library part CMP-04918-000213-1, "3.5-V TO 60-V, 5-A SYNCHRONOUS S", RoHS Compliant=Yes